# Altium PCB Arrow-ESC.PcbDoc (part 1 of 2)
Units mm, origin at the board's own origin, x right, y up, seen from the top; angles counter-clockwise.
Board outline 52 x 37.5 mm, 6 copper layers (Top Layer (SIG), Int1 (GND), Int2 (PWR), Int3 (SIG), Int4 (GND), Bottom Layer (SIG)), stack 1.546 mm thick; 104 components, 70 nets, 376 pads, 567 vias.
Unrouted connection lines stored in the file: 69.
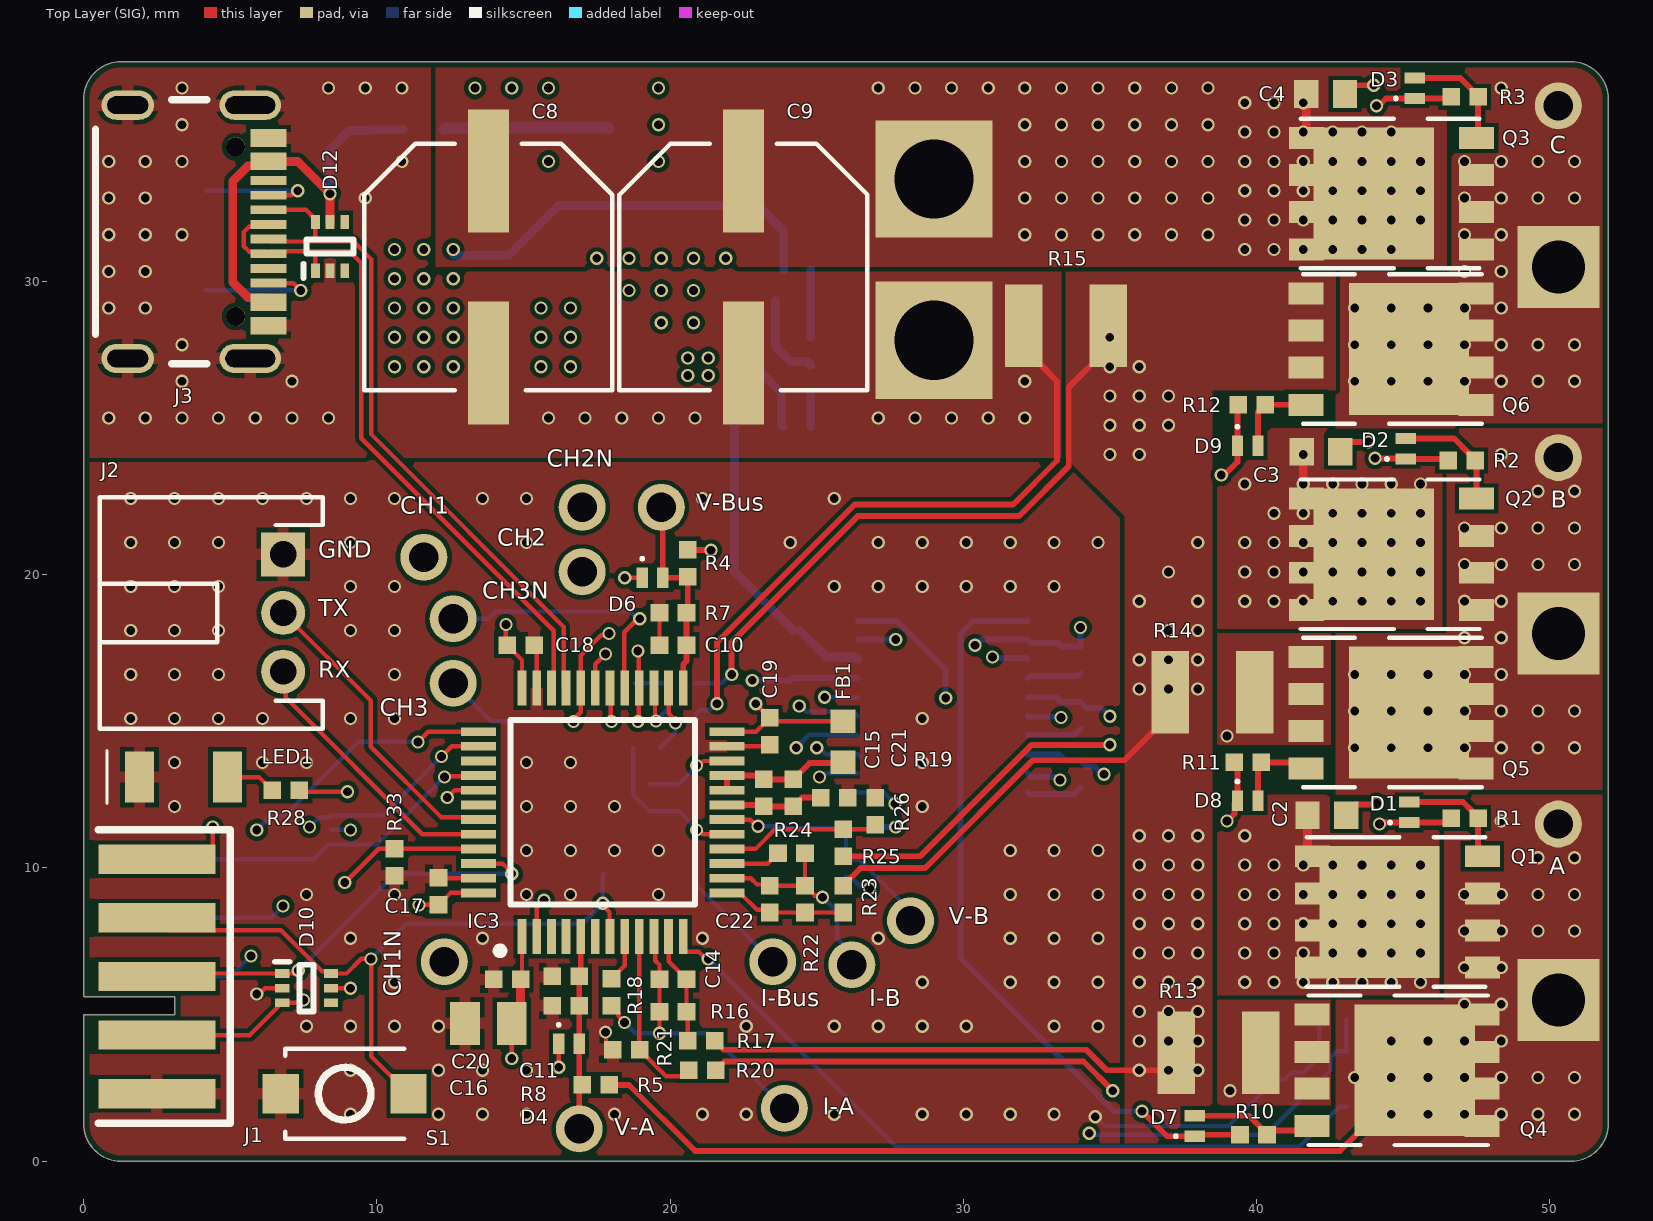
[diagram p0: Top Layer (SIG) view]
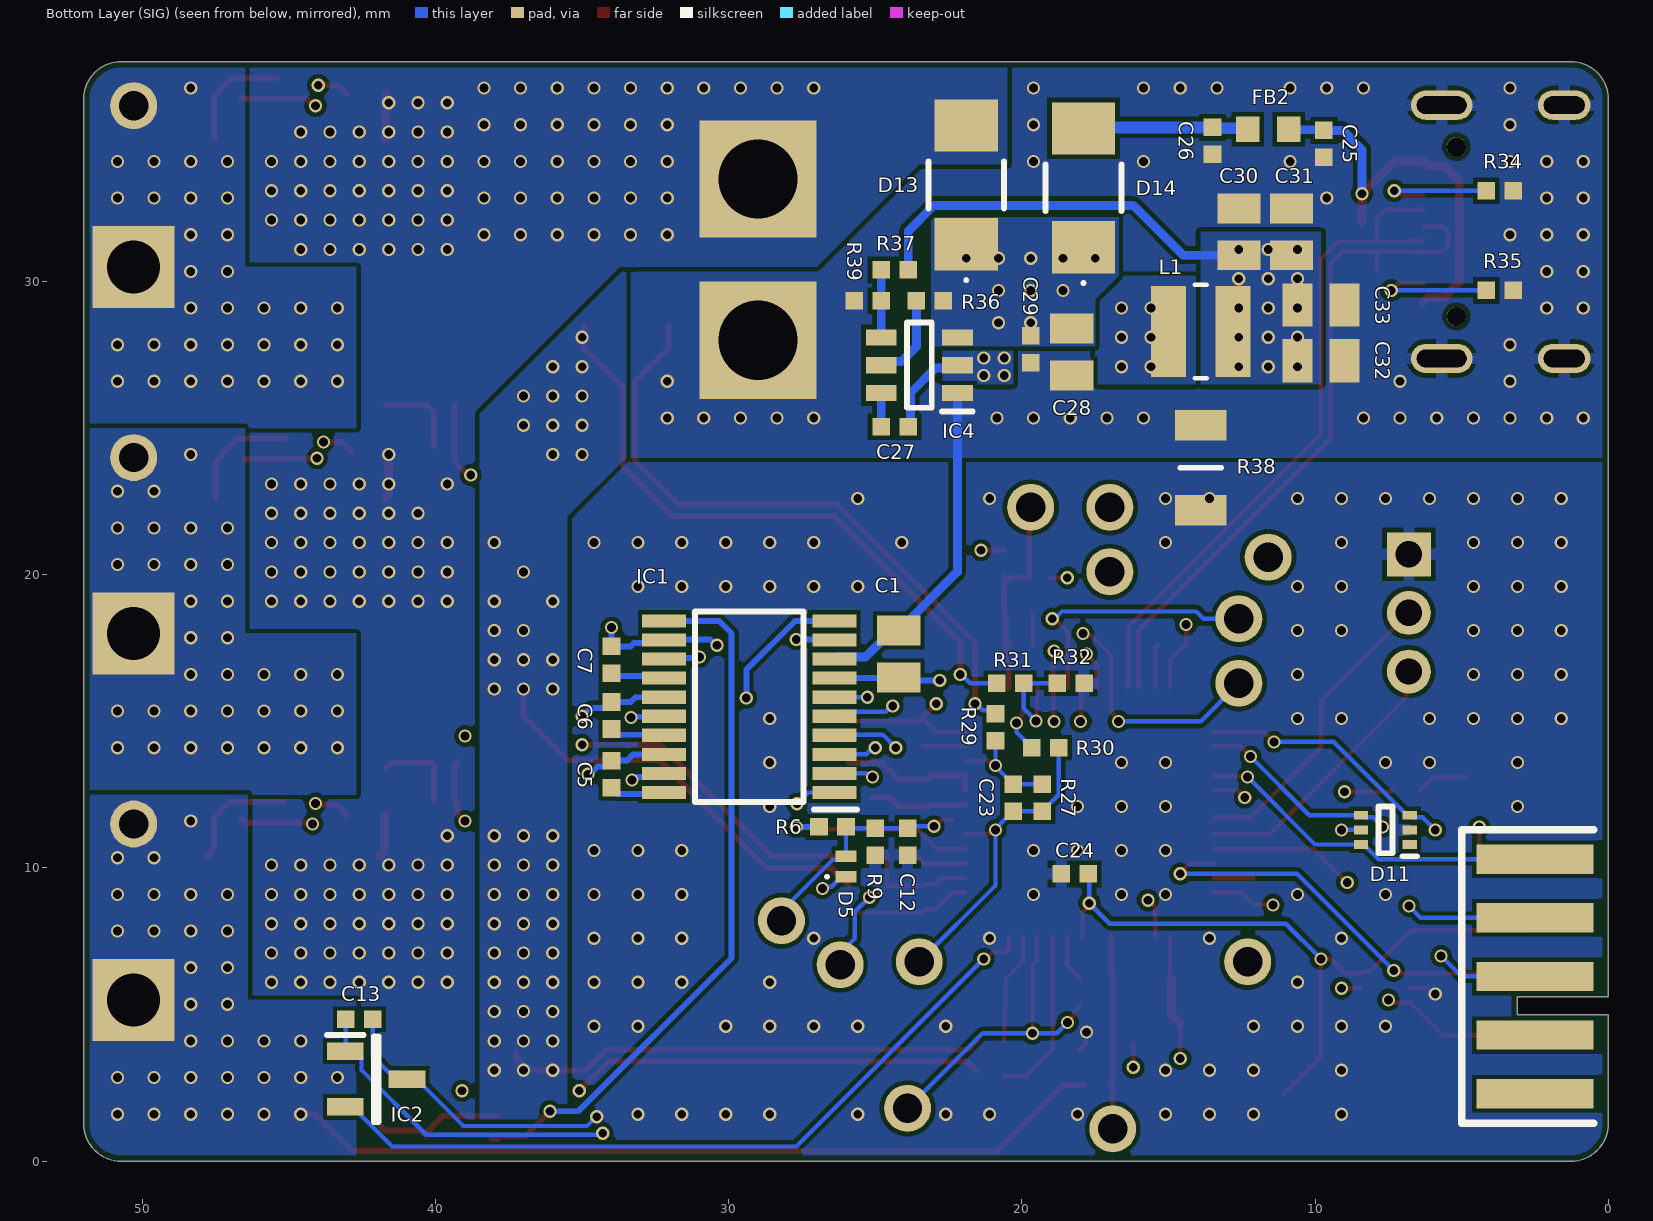
[diagram p1: Bottom Layer (SIG) view, seen from below]
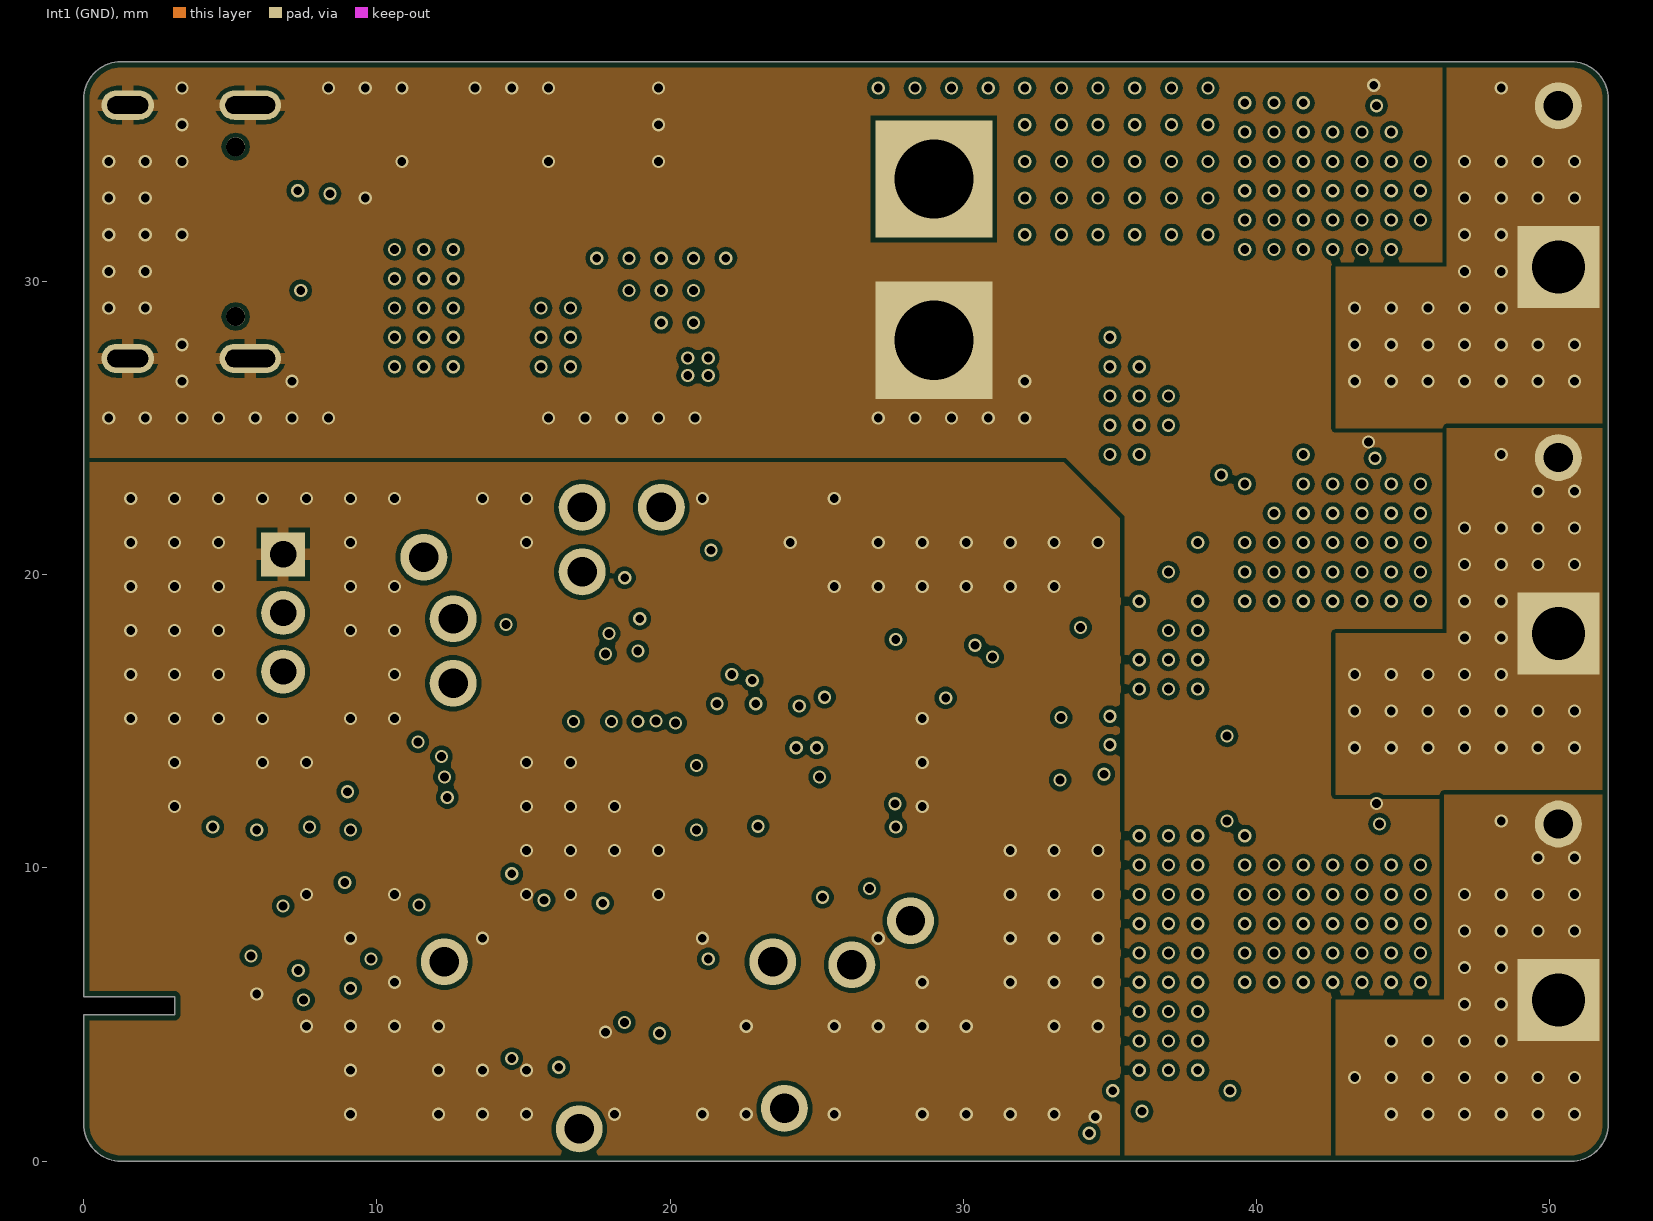
[diagram p2: Int1 (GND)]
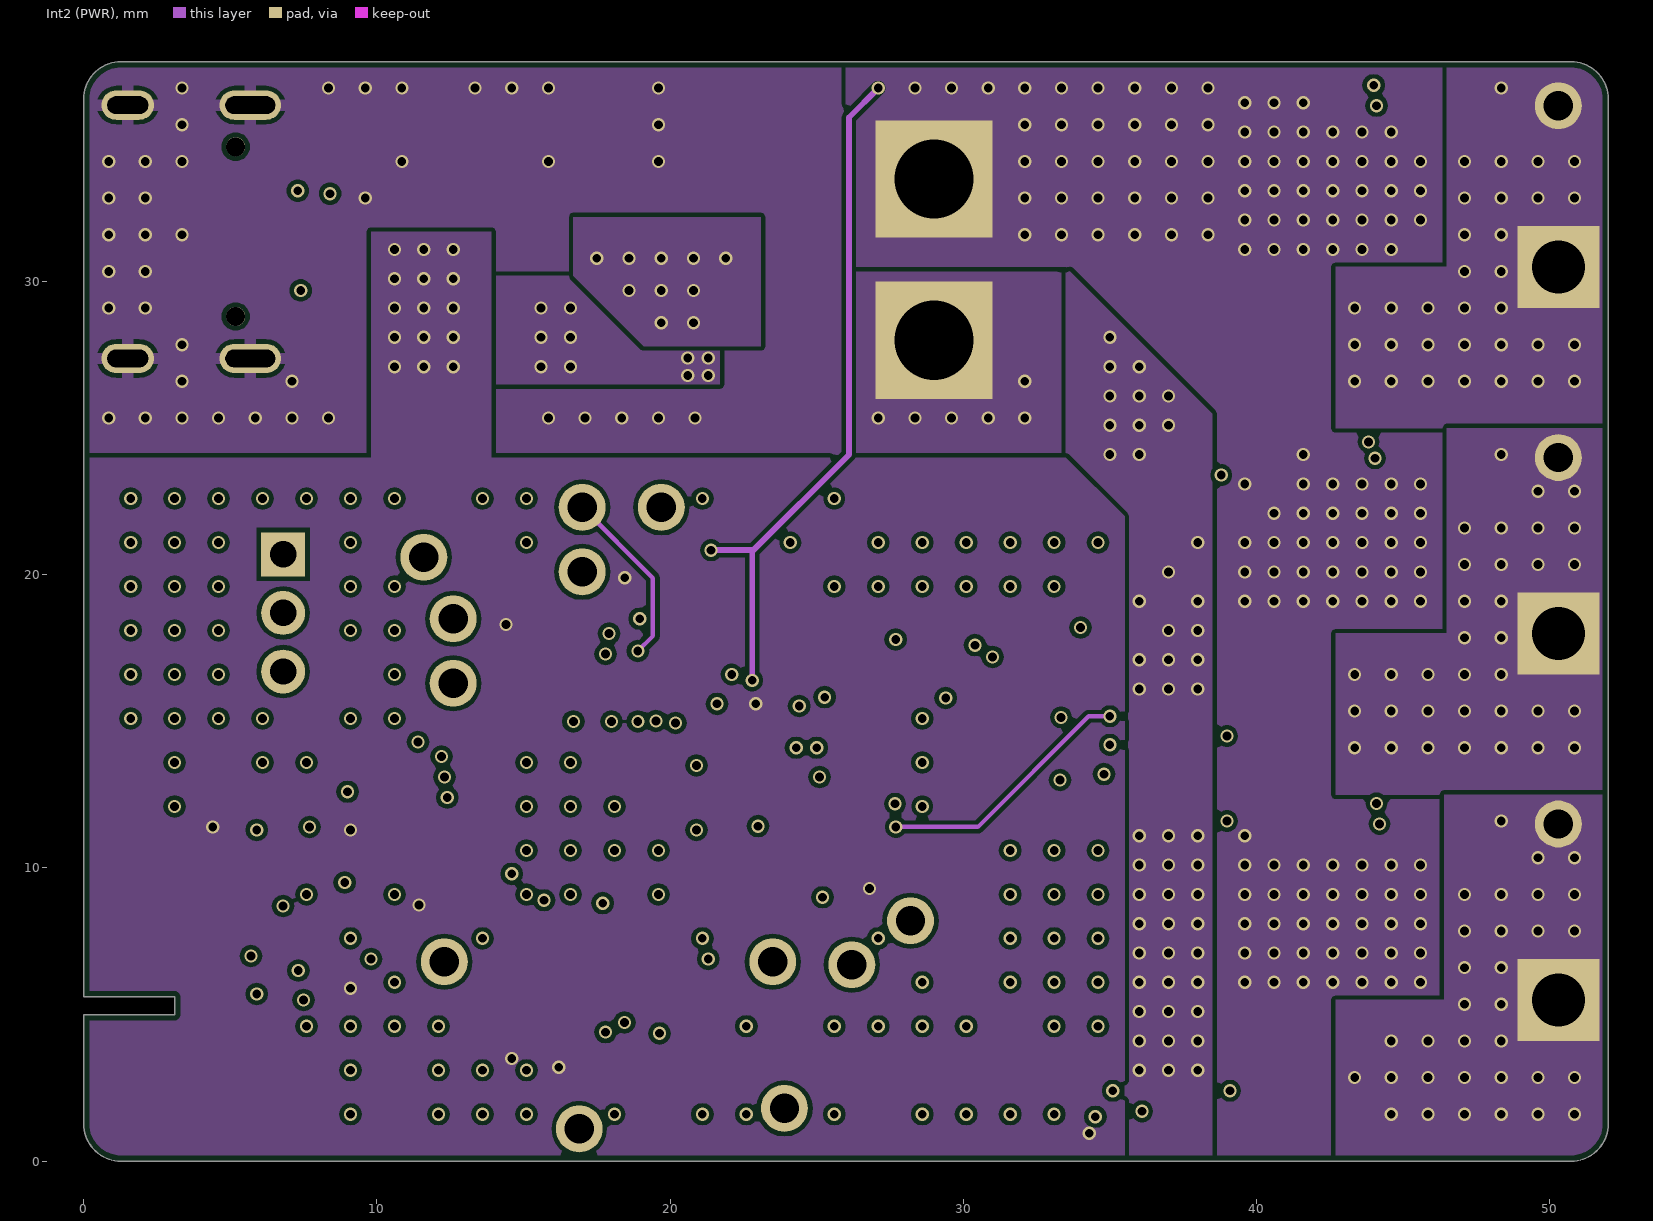
[diagram p3: Int2 (PWR)]
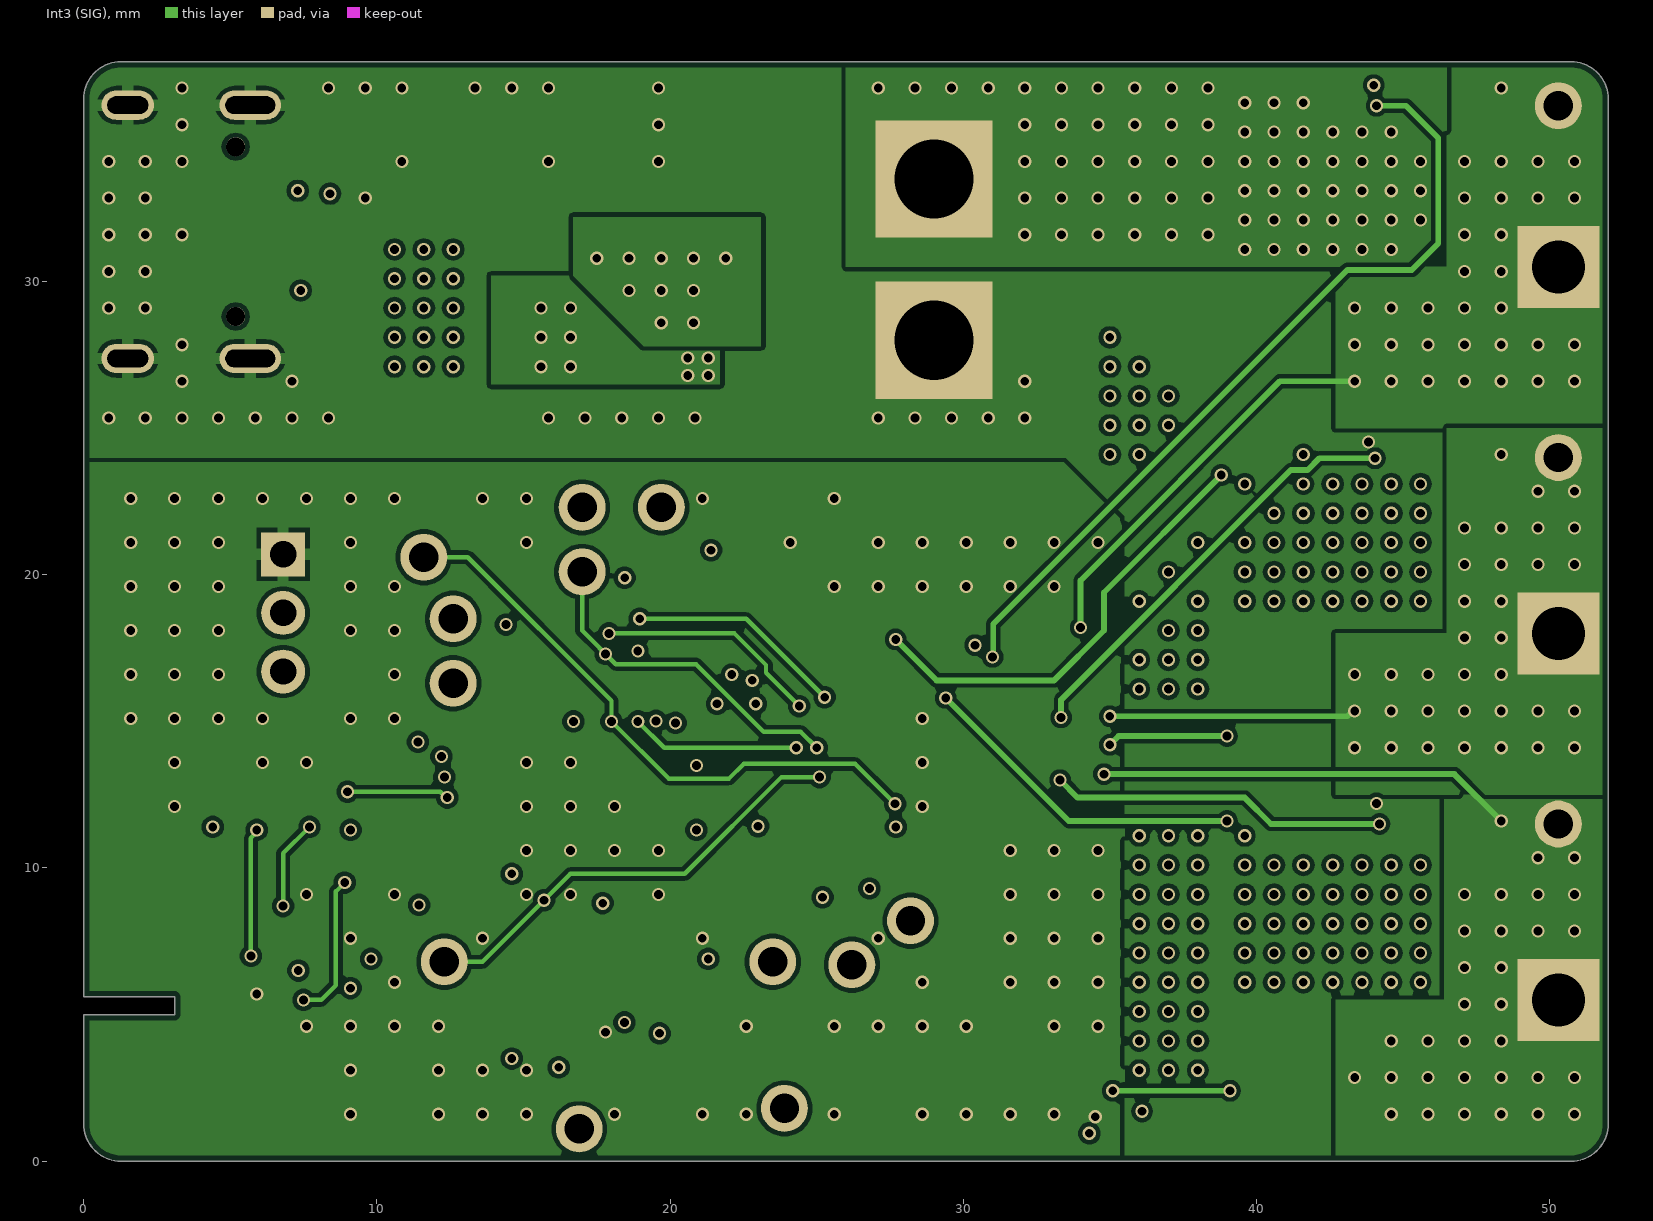
[diagram p4: Int3 (SIG)]
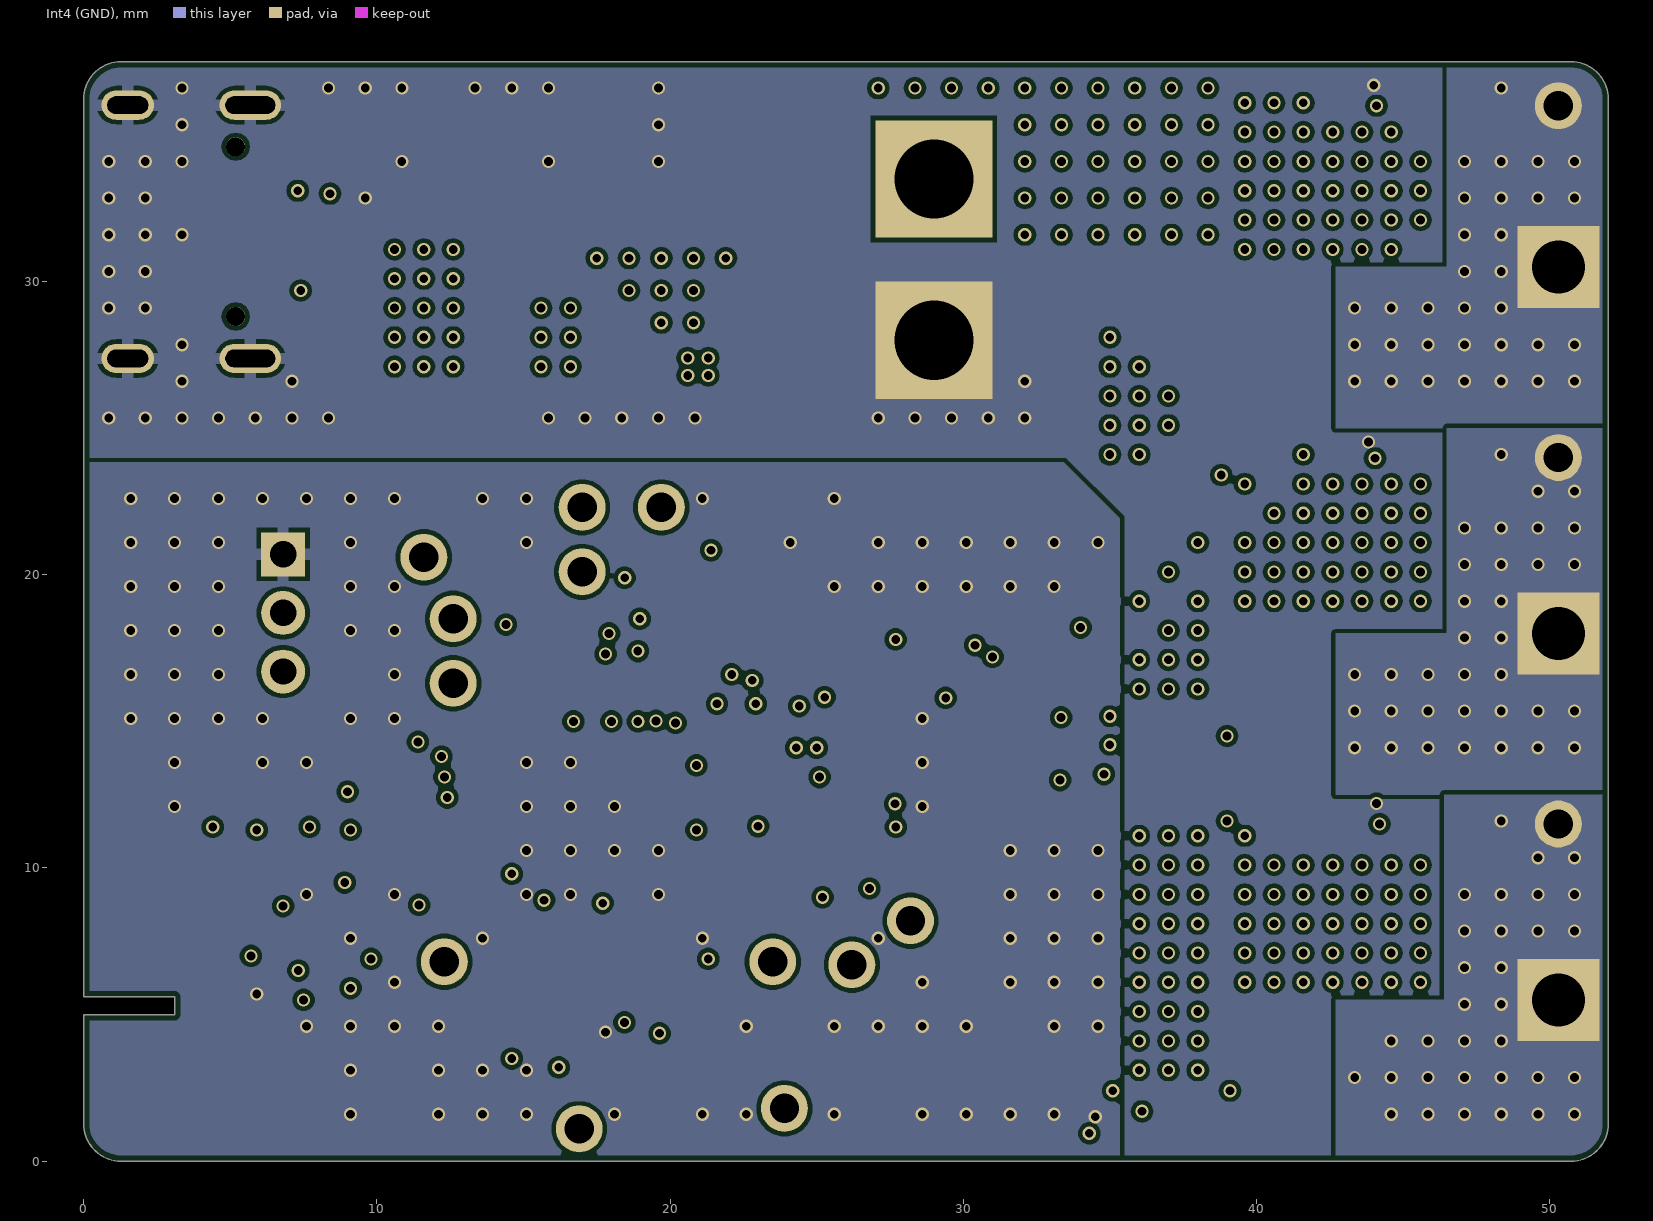
[diagram p5: Int4 (GND)]
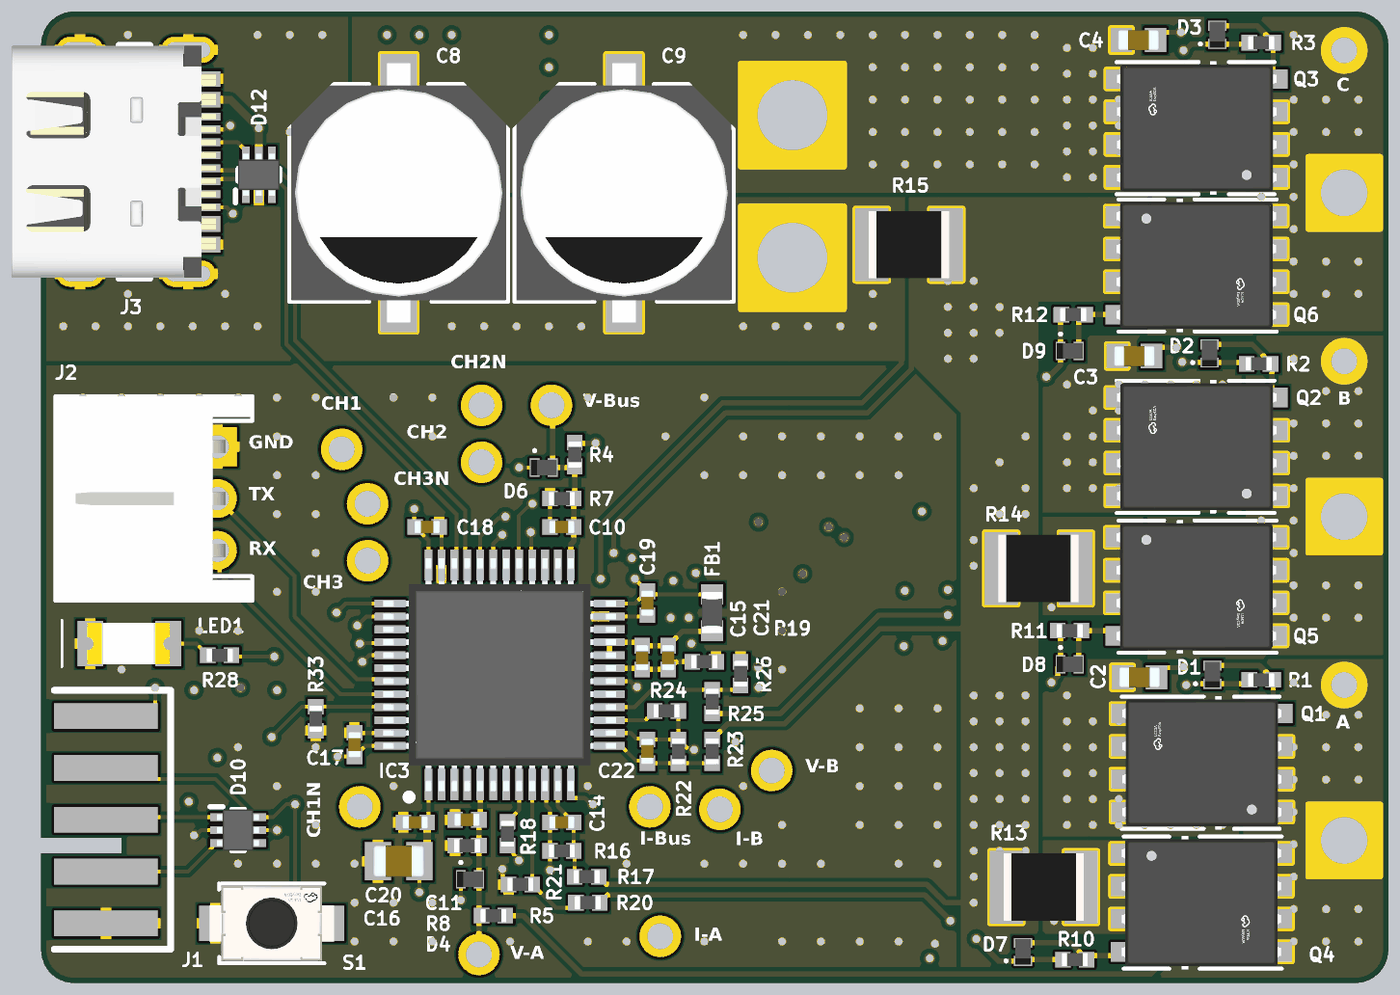
[diagram p7: 3D render of the assembled board from above, using the file's embedded part models]
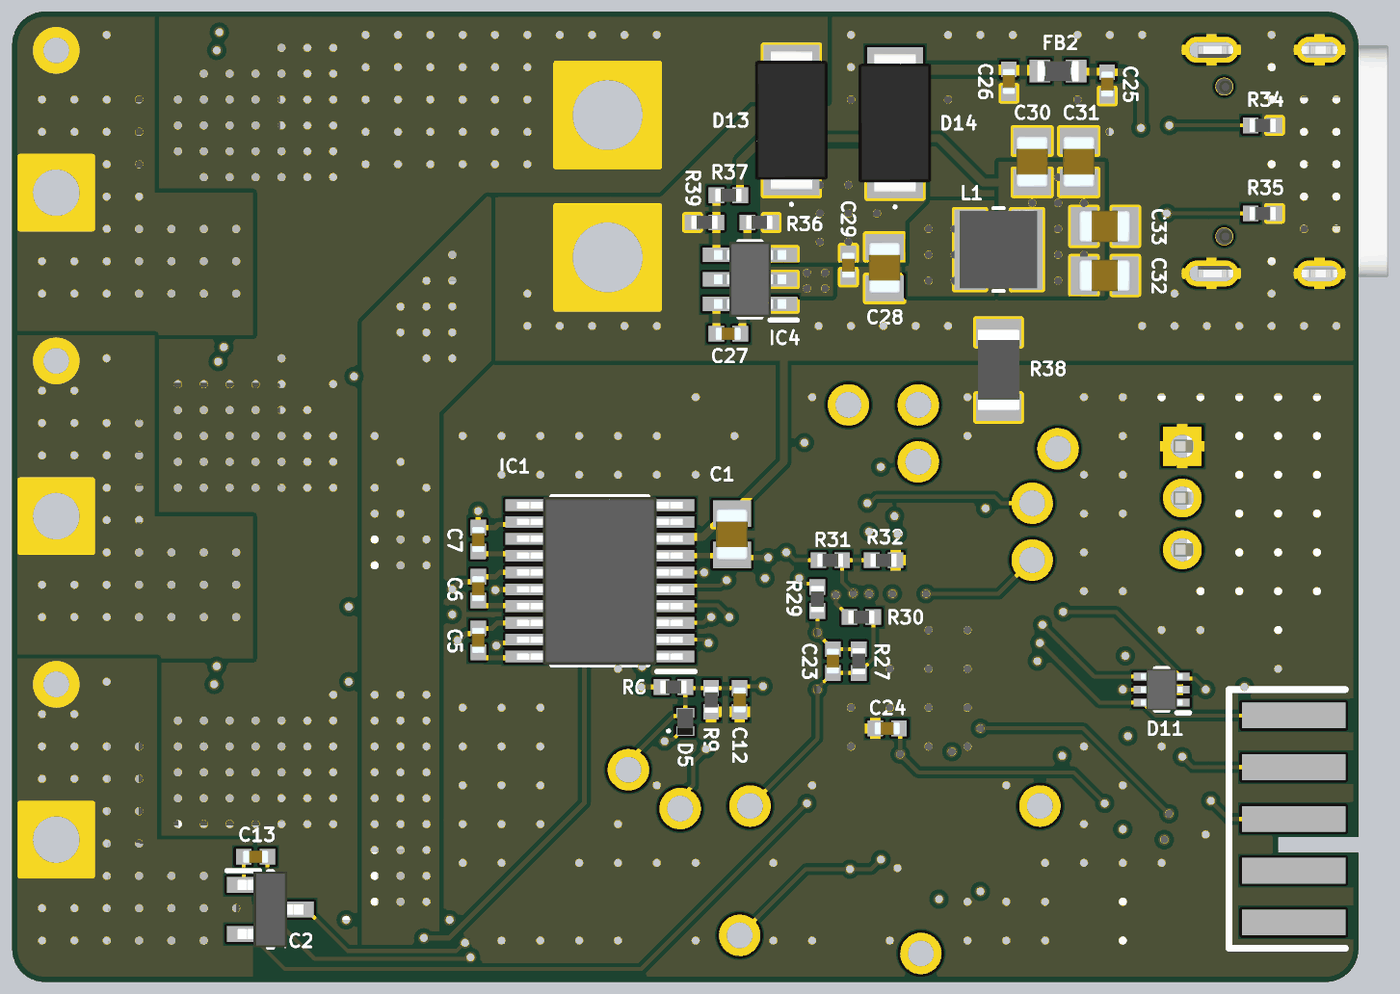
[diagram p8: 3D render of the assembled board from below, using the file's embedded part models]

## Layer stack, top to bottom
Top Solder: solder mask 0.0254, SM-001, Dk 4
Top Layer (SIG): signal copper 0.035
Dielectric 1: prepreg 0.0994, PP-015, Dk 4.1
Int1 (GND): signal copper 0.0152
Dielectric 3: core 0.55, Core-035, Dk 4.6
Int2 (PWR): signal copper 0.0152
Dielectric 4: prepreg 0.1164, PP-016, Dk 4.16
Int3 (SIG): signal copper 0.0152
Dielectric 6: core 0.55, Core-035, Dk 4.6
Int4 (GND): signal copper 0.0152
Dielectric 8: prepreg 0.0994, PP-015, Dk 4.1
Bottom Layer (SIG): signal copper 0.035
Bottom Solder: solder mask 0.0254, SM-001, Dk 4

## Board outline
0,1.27 0,5 3.1,5 3.1,5.6 0,5.6 0,36.23 cw(c1.27,36.23) 1.27,37.5 50.73,37.5 cw(c50.73,36.23) 52,36.23 52,1.27 cw(c50.73,1.27) 50.73,0 1.27,0 cw(c1.27,1.27)

## Design rules (kind name [scope] priority, off if disabled: settings)
BoardOutlineClearance [All] p1: gap=0.2 ignorepadtopadclearanceinfootprint=FALSE
Clearance "Stitching NetC15_1" [IsStitchingVia and InNet('NetC15_1') vs (IsVia and (Not IsStitchingVia)) Or IsPad] p1: gap=0 ignorepadtopadclearanceinfootprint=FALSE
Clearance [All] p2: gap=0.15 ignorepadtopadclearanceinfootprint=TRUE
DiffPairsRouting [All] p1: maxlimit=0.185 minlimit=0.127 mostfreqgap=0.127 toplayer_mingap=0.185 toplayer_prefgap=0.185 toplayer_minwidth=0.15 toplayer_maxwidth=0.15 toplayer_prefwidth=0.15 midlayer1_maxgap=0.127 midlayer1_minwidth=0.118 midlayer1_maxwidth=0.118 midlayer1_prefwidth=0.118 midlayer2_maxgap=0.127 midlayer2_minwidth=0.118 midlayer2_maxwidth=0.118 midlayer2_prefwidth=0.118 midlayer3_maxgap=0.127 midlayer3_minwidth=0.108 midlayer3_maxwidth=0.108 midlayer3_prefwidth=0.108 midlayer4_maxgap=0.127 midlayer4_minwidth=0.108 midlayer4_maxwidth=0.108 midlayer4_prefwidth=0.108 bottomlayer_mingap=0.185 bottomlayer_prefgap=0.185 bottomlayer_minwidth=0.15 bottomlayer_maxwidth=0.15 bottomlayer_prefwidth=0.15 impedanceprofiledriven=TRUE impedanceprofileid={39DB927E-795B-4ED0-B4A4-2D9BE5016878} impedanceprofilevalue=90.000000 maxuncoupledlength=12.7
HoleSize [All] p1: absolutevalues=TRUE maxlimit=5 minlimit=0.025 maxpercent=80.000 minpercent=20.000
HoleToHoleClearance [All] p1: gap=0.2 allowstackedmicrovias=FALSE
MinimumSolderMaskSliver [All] p1: minsoldermaskwidth=0.1
PolygonConnect PolygonConnect_2 [All vs isVia] p1: connectstyle=Direct reliefconductorwidth=0.254 reliefentries=4 polygonreliefangle="90 Angle" airgapwidth=0.254
PolygonConnect PolygonConnect_4 [(InNet('PGND') AND (InComponent('J3') OR InComponent('R25') OR InComponent('R20') OR InComponent('R21') OR InComponent('D3') OR InComponent('C19') OR InComponent('C18')))] p2: connectstyle=Relief reliefconductorwidth=0.4 reliefentries=4 polygonreliefangle="90 Angle" airgapwidth=0.15
PolygonConnect PolygonConnect_1 [InNetClass('High-Current')] p3: connectstyle=Direct reliefconductorwidth=0.254 reliefentries=4 polygonreliefangle="90 Angle" airgapwidth=0.254
PolygonConnect [InComponentClass('U_Buck')] p4: connectstyle=Direct reliefconductorwidth=0.254 reliefentries=4 polygonreliefangle="90 Angle" airgapwidth=0.127
PolygonConnect PolygonConnect_3 [All] p5: connectstyle=Relief reliefconductorwidth=0.4 reliefentries=4 polygonreliefangle="90 Angle" airgapwidth=0.15
RoutingVias [All] p1: holewidth=0.711 width=0.8 viastyle="Through Hole" minholewidth=0.3 minwidth=0.45 maxholewidth=0.711 maxwidth=1.27
SilkToSilkClearance [All] p1: silktosilkclearance=0.1
SilkToSolderMaskClearance [IsPad] p1: minsilkscreentomaskgap=0.1 clearancetoexposedcopper=TRUE
SolderMaskExpansion SolderMaskExpansion_1 [IsVia] p1: expansion=0.102 istentingtop=TRUE
SolderMaskExpansion [All] p2: expansion=0.102 istentingtop=FALSE
SupplyNets "Schematic Supply Nets_7" [InNet('+3V3')] p1: voltage=0.000
SupplyNets "Schematic Supply Nets" [InNet('+3V3A')] p2: voltage=0.000
SupplyNets "Schematic Supply Nets_6" [InNet('PGND')] p3: voltage=0.000
SupplyNets "Schematic Supply Nets_5" [InNet('DGND')] p4: voltage=0.000
SupplyNets "Schematic Supply Nets_3" [InNet('AGND')] p5: voltage=0.000
SupplyNets "Schematic Supply Nets_1" [InNet('VBATT')] p6: voltage=0.000
Width [All] p1: maxlimit=0.5 minlimit=0.15 preferedwidth=0.15 minimp=50.000000 maximp=50.000000 favimp=50.000000
24 further rules are at their usual default settings.

## Classes and differential pairs
component class "Top Level": J2
net class High-Current: NetQ4_1 NetQ5_1 NetQ6_1 PGND SHA SHB SHC VBATT
component class "U_Motor Driver": C1 C2 C3 C4 C5 C6 C7 C8 C9 C10 C11 C12 C13 D1 D2 D3 D4 D5 D6 D7 D8 D9 IC1 IC2 Q1 Q2 Q3 Q4 Q5 Q6 R1 R2 R3 R4 R5 R6 R7 R8 R9 R10 R11 R12 R13 R14 R15
component class U_Buck: C25 C26 C27 C28 C29 C30 C31 C32 C33 D12 D13 D14 FB2 IC4 J3 L1 R34 R35 R36 R37 R38 R39
component class U_STM32G4: C14 C15 C16 C17 C18 C19 C20 C21 C22 C23 C24 D10 D11 FB1 IC3 J1 LED1 R16 R17 R18 R19 R20 R21 R22 R23 R24 R25 R26 R27 R28 R29 R30 R31 R32 R33 S1
differential pair USB_D: +USB_D_P -USB_D_N

## Components (designator, comment, footprint, x,y, rotation, side; value= is the part's Value field where it differs from the comment)
C1 "0805,X5R,10uF,25V,10%" CAPC2012X145N 24.2,17.3 r90 bottom
C2 "0603,X5R,2.2uF,25V,10%" CAPC1608X90N 42.4,11.8 r0 top
C3 "0603,X5R,2.2uF,25V,10%" CAPC1608X90N 42.2,24.2 r0 top
C4 "0603,X5R,2.2uF,25V,10%" CAPC1608X90N 42.36,36.4 r0 top
C5 "0402,X7R,100nF,50V,10%" CAPC1005X55N 34,13.2 r270 bottom
C6 "0402,X7R,100nF,50V,10%" CAPC1005X55N 34,15.2 r270 bottom
C7 "0402,X7R,100nF,50V,10%" CAPC1005X55N 34,17.1 r270 bottom
C8 "560uF,25V,20%" CAP-SMD_BD8.0-L8.3-W8.3-FD 13.8,30.5 r270 top
C9 "560uF,25V,20%" CAP-SMD_BD8.0-L8.3-W8.3-FD 22.5,30.5 r270 top
C10 "0402,X7R,47nF,50V,5%" CAPC1005X55N 20.1,17.6 r0 top
C11 "0402,X7R,47nF,50V,5%" CAPC1005X55N 16.44,6.3 r0 top
C12 "0402,X7R,47nF,50V,5%" CAPC1005X55N 23.9,10.9 r90 bottom
C13 "0402,X7R,100nF,50V,10%" CAPC1005X55N 42.6,4.84 r0 bottom
C14 "0402,NP0,390pF,50V,5%" CAPC1005X55N 20.1,6.2 r180 top
C15 "0402,X7R,100nF,50V,10%" CAPC1005X55N 23.2,12.56 r90 top
C16 "0805,X5R,10uF,25V,10%" CAPC2012X145N 13.8,4.7 r0 top
C17 "0402,X7R,100nF,50V,10%" CAPC1005X55N 12.1,9.2 r270 top
C18 "0402,X7R,100nF,50V,10%" CAPC1005X55N 14.9,17.6 r180 top
C19 "0402,X7R,100nF,50V,10%" CAPC1005X55N 23.4,14.66 r90 top
C20 "0402,X7R,100nF,50V,10%" CAPC1005X55N 14.44,6.2 r0 top
C21 "0402,X5R,1uF,25V,10%" CAPC1005X55N 24.2,12.56 r90 top
C22 "0402,NP0,390pF,50V,5%" CAPC1005X55N 23.4,8.94 r90 top
C23 "0402,NP0,390pF,50V,5%" CAPC1005X55N 20.3,12.4 r270 bottom
C24 "0402,X7R,100nF,50V,10%" CAPC1005X55N 18.2,9.8 r180 bottom
C25 "0402,X7R,47nF,50V,5%" CAPC1005X55N 9.7,34.7 r90 bottom
C26 "0402,X7R,100nF,50V,10%" CAPC1005X55N 13.5,34.8 r90 bottom
C27 "0402,X7R,100nF,50V,10%" CAPC1005X55N 24.34,25.05 r0 bottom
C28 "0805,X5R,10uF,25V,10%" CAPC2012X145N 18.3,27.6 r90 bottom
C29 "0402,X7R,100nF,50V,10%" CAPC1005X55N 19.7,27.7 r90 bottom
C30 "0805,X5R,22uF,25V,20%" CAPC2012X145N 12.6,31.7 r270 bottom
C31 "0805,X5R,22uF,25V,20%" CAPC2012X145N 10.8,31.7 r270 bottom
C32 "0805,X5R,22uF,25V,20%" CAPC2012X145N 9.8,27.3 r0 bottom
C33 "0805,X5R,22uF,25V,20%" CAPC2012X145N 9.8,29.2 r0 bottom
D1 "CDBQC0130L-HF" CDBQC0130LHF 45.21,11.9 r90 top
D2 "CDBQC0130L-HF" CDBQC0130LHF 45.1,24.3 r90 top
D3 "CDBQC0130L-HF" CDBQC0130LHF 45.4,36.6 r90 top
D4 "CDBQC0130L-HF" CDBQC0130LHF 16.55,4 r0 top
D5 "CDBQC0130L-HF" CDBQC0130LHF 26,10.05 r90 bottom
D6 "CDBQC0130L-HF" CDBQC0130LHF 19.4,19.9 r0 top
D7 "CDBQC0130L-HF" CDBQC0130LHF 37.9,1.2 r90 top
D8 "CDBQC0130L-HF" CDBQC0130LHF 39.7,12.3 r0 top
D9 "CDBQC0130L-HF" CDBQC0130LHF 39.7,24.4 r0 top
D10 "DT1446-04V-7" SOTFL50P162X60-6N 7.6,5.9 r0 top
D11 "DT1446-04V-7" SOTFL50P162X60-6N 7.6,11.3 r0 bottom
D12 "DT1446-04V-7" SOTFL50P162X60-6N 8.4,31.2 r90 top
D13 "SK34A-LTP" SK34ALTP 21.9,33.3 r270 bottom
D14 "SK34A-LTP" SK34ALTP 17.9,33.2 r270 bottom
FB1 "600R@100MHz" L0603 25.9,14.3 r90 top
FB2 "600R@100MHz" L0603 11.6,35.2 r0 bottom
IC1 "DRV8300DPWR" SOP65P640X120-20N 29.3,15.5 r0 bottom
IC2 "TMP236A2DBZR" SOT95P237X112-3N 42.025,2.8 r180 bottom
IC3 "STM32G431CBT6" QFP50P900X900X160-48N 17.7,11.9 r90 top
IC4 "TPS54202HDDCR" SOT95P280X100-6N 23.5,27.15 r0 bottom
J1 "STLINK-SW" 009159010061911 2.5,2.3 r90 top
J2 "S3B-PH-K-S-(LF)(SN)" CONN-TH_3P-P2.00_S3B-PH-K-S-LF-SN 6.8,18.7 r270 top
J3 "GT-USB-7010ASV" USB-C-SMD_G-SWITCH_GT-USB-7010ASV 3.9,31.7 r270 top
L1 "2.5A,10uH,135mR,20%" IND-SMD_L3.0-W3.0_FTC303020D 13.9,28.3 r180 bottom
LED1 "1206,GREEN" LEDC3216X120N 3.4,13.1 r0 top
Q1 "SIR182DP-T1-RE3" POWERPAK-SO-8_L5.9-W4.9-P1.27-LS6.2-BL 44.81,8.5 r90 top
Q2 "SIR182DP-T1-RE3" POWERPAK-SO-8_L5.9-W4.9-P1.27-LS6.2-BL 44.61,20.7 r90 top
Q3 "SIR182DP-T1-RE3" POWERPAK-SO-8_L5.9-W4.9-P1.27-LS6.2-BL 44.61,33 r90 top
Q4 "SIR182DP-T1-RE3" POWERPAK-SO-8_L5.9-W4.9-P1.27-LS6.2-BL 44.79,3.1 r270 top
Q5 "SIR182DP-T1-RE3" POWERPAK-SO-8_L5.9-W4.9-P1.27-LS6.2-BL 44.59,15.3 r270 top
Q6 "SIR182DP-T1-RE3" POWERPAK-SO-8_L5.9-W4.9-P1.27-LS6.2-BL 44.59,27.7 r270 top
R1 "0402,10R,1%" RESC1005X40N 47.1,11.7 r0 top
R2 "0402,10R,1%" RESC1005X40N 47,23.9 r0 top
R3 "0402,10R,1%" RESC1005X40N 47.1,36.3 r0 top
R4 "0402,4.7K,1%" RESC1005X40N 20.6,20.4 r90 top
R5 "0402,4.7K,1%" RESC1005X40N 17.46,2.6 r0 top
R6 "0402,4.7K,1%" RESC1005X40N 26.46,11.4 r0 bottom
R7 "0402,1K,1%" RESC1005X40N 20.1,18.7 r0 top
R8 "0402,1K,1%" RESC1005X40N 16.44,5.3 r0 top
R9 "0402,1K,1%" RESC1005X40N 25,10.9 r90 bottom
R10 "0402,10R,1%" RESC1005X40N 39.9,0.9 r0 top
R11 "0402,10R,1%" RESC1005X40N 39.7,13.6 r0 top
R12 "0402,10R,1%" RESC1005X40N 39.84,25.8 r0 top
R13 "1210, 1mR, 1%" R1210 38.7,3.7 r0 top
R14 "1210, 1mR, 1%" R1210 38.5,16 r0 top
R15 "1210, 1mR, 1%" R1210 33.5,28.5 r0 top
R16 "0402,100K,1%" RESC1005X40N 20.1,5.1 r0 top
R17 "0402,1K,1%" RESC1005X40N 21.06,4.1 r180 top
R18 "0402,0R,1%" RESC1005X40N 18,5.76 r90 top
R19 "0402,0R,1%" RESC1005X40N 25.6,12.4 r0 top
R20 "0402,1K,1%" RESC1005X40N 21.1,3.1 r180 top
R21 "0402,100K,1%" RESC1005X40N 18.5,3.8 r0 top
R22 "0402,100K,1%" RESC1005X40N 24.6,8.94 r270 top
R23 "0402,1K,1%" RESC1005X40N 25.9,8.94 r270 top
R24 "0402,0R,1%" RESC1005X40N 24.14,10.5 r180 top
R25 "0402,1K,1%" RESC1005X40N 25.9,10.86 r90 top
R26 "0402,100K,1%" RESC1005X40N 27,11.94 r270 top
R27 "0402,100K,1%" RESC1005X40N 19.3,12.4 r270 bottom
R28 "0402,330R,1%" RESC1005X40N 6.89,12.65 r180 top
R29 "0402,1K,1%" RESC1005X40N 20.9,14.8 r270 bottom
R30 "0402,0R,1%" RESC1005X40N 19.2,14.1 r0 bottom
R31 "0402,1K,1%" RESC1005X40N 20.4,16.3 r180 bottom
R32 "0402,100K,1%" RESC1005X40N 18.34,16.3 r0 bottom
R33 "0402,10K,1%" RESC1005X40N 10.6,10.2 r90 top
R34 "0402,5.1K,1%" RESC1005X40N 3.7,33.1 r0 bottom
R35 "0402,5.1K,1%" RESC1005X40N 3.7,29.7 r0 bottom
R36 "0402,510K,1%" RESC1005X40N 23.14,29.35 r180 bottom
R37 "0402,100K,1%" RESC1005X40N 24.34,30.4 r180 bottom
R38 "1206,0R,1%" RESC3116X65N 13.9,23.65 r270 bottom
R39 "0402,22.1K,1%" RESC1005X40N 25.26,29.35 r180 bottom
S1 "TS-1088-AR02016" SW-SMD_L3.9-W3.0-P4.45 8.9,2.3 r0 top

## Footprints (in the part's own frame and the unit in brackets; to place one, negate y for a bottom-side part, rotate by r counter-clockwise, add the part's x,y. Pads: shape width x height; smd on the part's side, far side on the other; paste and mask are expansions set on the pad)
009159010061911 [mm]
  rect 1x4 smd: 1(0,0) 2(2,0) 3(4,0) 4(6,0) 5(8,0)
  rect 1x4 smd far side: 6(0,0) 7(2,0) 8(4,0) 9(6,0) 10(8,0)
  silkscreen extent -1,-2.5 9,2
CAP-SMD_BD8.0-L8.3-W8.3-FD [mm]
  rect 4.2x1.4 smd: 1(-3.27,0) 2(3.27,0)
  silkscreen extent -4.2,-4.23 4.2,4.23, body extent -5,-4.15 5,4.15, height 10
CAPC1005X55N [mm]
  rect 0.6x0.6 smd: 1(-0.46,0) 2(0.46,0)
  body extent -0.5,-0.25 0.5,0.25, height 0.55
CAPC1608X90N [mm]
  rect 0.83x0.94 smd: 1(-0.66,0) 2(0.66,0)
  body extent -0.8,-0.4 0.8,0.4, height 0.9
CAPC2012X145N [mm]
  rect 1.02x1.47 smd: 1(-0.8,0) 2(0.8,0)
  body extent -1,-0.63 1,0.63, height 1.45
CDBQC0130LHF [mm]
  rect 0.38x0.7 smd: 1(-0.35,0) 2(0.35,0)
  silkscreen extent -0.4,0.6 -0.3,0.7, body extent -0.5,-0.3 0.5,0.3, height 0.55
CONN-TH_3P-P2.00_S3B-PH-K-S-LF-SN [mm]
  rect 1.5x1.5 hole 0.9: 1(-2,0)
  round 1.5 hole 0.9: 2(0,0) 3(2,0)
  silkscreen extent -3.95,-6.25 3.95,1.35, body extent -3.95,-6.17 3.95,1.43, height 4.8
IND-SMD_L3.0-W3.0_FTC303020D [mm]
  rect 1.2x3.1 smd: 1(-1.1,0) 2(1.1,0)
  silkscreen extent -0.2,-1.6 0.2,1.6, body extent -1.5,-1.5 1.5,1.51, height 2
L0603 [mm]
  rect 0.8x0.86 smd: 1(-0.7,0) 2(0.7,0)
  body extent -0.8,-0.4 0.8,0.4, height 0.5
LEDC3216X120N [mm]
  rect 1x1.75 smd: 1(-1.5,0) 2(1.5,0)
  silkscreen extent -2.6,-0.9 -2.6,0.9, body extent -1.63,-0.8 1.57,0.8, height 1.1
POWERPAK-SO-8_L5.9-W4.9-P1.27-LS6.2-BL [mm]
  rect 0.75x1.2 smd: 1(-1.9,-2.9) 2(-0.63,-2.9) 3(0.63,-2.9) 4(1.9,-2.9) 5(1.9,2.9) 6(0.63,2.9) 7(-0.63,2.9) 8(-1.9,2.9)
  rect 4.5x4.1 smd: 8(0,0.61)
  silkscreen extent -2.55,-3 2.55,3.1, body extent -2.58,-3.08 2.58,3.08, height 1.06
QFP50P900X900X160-48N [mm]
  rect 1.2x0.3 smd: 1(-4.238,2.75) 2(-4.238,2.25) 3(-4.238,1.75) 4(-4.238,1.25) 5(-4.238,0.75) 6(-4.238,0.25) 7(-4.238,-0.25) 8(-4.238,-0.75) 9(-4.238,-1.25) 10(-4.238,-1.75) 11(-4.238,-2.25) 12(-4.238,-2.75) 25(4.238,-2.75) 26(4.238,-2.25) 27(4.238,-1.75) 28(4.238,-1.25) 29(4.238,-0.75) 30(4.238,-0.25) 31(4.238,0.25) 32(4.238,0.75) 33(4.238,1.25) 34(4.238,1.75) 35(4.238,2.25) 36(4.238,2.75)
  rect 0.3x1.2 smd: 13(-2.75,-4.238) 14(-2.25,-4.238) 15(-1.75,-4.238) 16(-1.25,-4.238) 17(-0.75,-4.238) 18(-0.25,-4.238) 19(0.25,-4.238) 20(0.75,-4.238) 21(1.25,-4.238) 22(1.75,-4.238) 23(2.25,-4.238) 24(2.75,-4.238) 37(2.75,4.238) 38(2.25,4.238) 39(1.75,4.238) 40(1.25,4.238) 41(0.75,4.238) 42(0.25,4.238) 43(-0.25,4.238) 44(-0.75,4.238) 45(-1.25,4.238) 46(-1.75,4.238) 47(-2.25,4.238) 48(-2.75,4.238)
  silkscreen extent -4.85,-3.15 3.15,3.62, body extent -4.5,-4.5 4.5,4.5, height 1.6
R1210 [mm]
  rect 1.28x2.81 smd: 1(-1.44,0) 2(1.44,0)
  body extent -1.55,-1.3 1.55,1.3, height 0.55
RESC1005X40N [mm]
  rect 0.6x0.6 smd: 1(-0.46,0) 2(0.46,0)
  body extent -0.5,-0.25 0.5,0.25, height 0.4
RESC3116X65N [mm]
  rect 1.05x1.75 smd: 1(-1.45,0) 2(1.45,0)
  silkscreen extent 0,-0.7 0,0.7, body extent -1.55,-0.8 1.55,0.8, height 0.65
SK34ALTP [mm]
  rect 1.78x2.16 smd: 1(2.025,0) 2(-2.025,0)
  silkscreen extent -0.8,-1.29 3.3,1.29, body extent -2.7,-1.4 2.7,1.4, height 2.26
SOP65P640X120-20N [mm]
  rect 1.5x0.45 smd: 1(-2.9,2.925) 2(-2.9,2.275) 3(-2.9,1.625) 4(-2.9,0.975) 5(-2.9,0.325) 6(-2.9,-0.325) 7(-2.9,-0.975) 8(-2.9,-1.625) 9(-2.9,-2.275) 10(-2.9,-2.925) 11(2.9,-2.925) 12(2.9,-2.275) 13(2.9,-1.625) 14(2.9,-0.975) 15(2.9,-0.325) 16(2.9,0.325) 17(2.9,0.975) 18(2.9,1.625) 19(2.9,2.275) 20(2.9,2.925)
  silkscreen extent -3.67,-3.25 1.85,3.5, body extent -3.2,-3.25 3.2,3.25, height 1.13
SOT95P237X112-3N [mm]
  rect 1.25x0.6 smd: 1(-1.05,0.95) 2(-1.05,-0.95) 3(1.05,0)
  silkscreen extent -1.68,-1.46 0.08,1.5, body extent -1.27,-1.46 1.27,1.46, height 1
SOT95P280X100-6N [mm]
  rect 1.05x0.55 smd: 1(-1.3,0.95) 2(-1.3,0) 3(-1.3,-0.95) 4(1.3,-0.95) 5(1.3,0) 6(1.3,0.95)
  silkscreen extent -1.83,-1.45 0.43,1.58, body extent -1.4,-1.45 1.4,1.45, height 1
SOTFL50P162X60-6N [mm]
  rect 0.492x0.3 smd: 1(-0.834,0.5) 2(-0.834,0) 3(-0.834,-0.5) 4(0.834,-0.5) 5(0.834,0) 6(0.834,0.5)
  silkscreen extent -1.08,-0.8 0.24,0.9, body extent -0.81,-0.8 0.81,0.8, height 0.6
SW-SMD_L3.9-W3.0-P4.45 [mm]
  rect 1.23x1.36 smd: 1(-2.18,0) 2(2.18,0)
  silkscreen extent -2.03,-1.54 2.03,1.54, body extent -2.4,-1.45 2.4,1.45, height 1.95
USB-C-SMD_G-SWITCH_GT-USB-7010ASV [mm]
  rrect100% 1x2.1 hole 1.7 slot 0.6 at 0 deg: 1(-4.32,1.78) 2(4.32,1.78)
  rrect100% 1x1.8 hole 1.4 slot 0.6 at 0 deg: 3(4.32,-2.4) 4(-4.32,-2.4)
  rect 0.6x1.24 smd: A1B12(-3.2,2.4) A4B9(-2.4,2.4) B1A12(3.2,2.4) B4A9(2.4,2.4)
  rect 0.3x1.24 smd: A5(-1.25,2.4) A6(-0.25,2.4) A7(0.25,2.4) A8(1.25,2.4) B5(1.75,2.4) B6(0.75,2.4) B7(-0.75,2.4) B8(-1.75,2.4)
  round 0.65 hole 0.65: Un1(2.89,1.28) Un2(-2.9,1.28)
  silkscreen extent -4.5,-3.5 4.5,0.3, body extent -4.47,-5.05 4.47,2.85, height 3.16

## Part data
C1 C16 C28: library part CC0805KKX5R8BB106, "10 µF ±10% 25V Ceramic Capacitor X5R 0805 (2012 Metric)", LCSC Part #=C89831, MANUFACTURER_NAME=YAGEO, Mouser Part Number=603-CC805KKX5R8BB106, Arrow Part Number=CC0805KKX5R8BB106, Arrow Price/Stock=https://www.arrow.com/en/products/cc0805kkx5r8bb106/yageo?utm_currency=USD&region=nac, Datasheet Link=https://www.yageo.com/upload/media/product/productsearch/datasheet/mlcc/UPY-GPHC_X5R_4V-to-50V_27.pdf, Height=1.45mm, MANUFACTURER_PART_NUMBER=CC0805KKX5R8BB106, Mouser Price/Stock=https://www.mouser.co.uk/ProductDetail/YAGEO/CC0805KKX5R8BB106?qs=57cj7OiSijm89pM64t1AGQ%3D%3D
C2 C3 C4: library part CC0603KRX5R8BB225, "2.2 µF ±10% 25V Ceramic Capacitor X5R 0603 (1608 Metric)", Arrow Part Number=CC0603KRX7R9BB105, LCSC Part #=C309478, MANUFACTURER_NAME=YAGEO, MANUFACTURER_PART_NUMBER=CC0603JRNPO9BN560, Mouser Part Number=603-CC603KRX7R9BB105, Arrow Price/Stock=https://www.arrow.com/en/products/cc0603krx7r9bb105/yageo?utm_currency=USD&region=nac, Datasheet Link=https://www.yageo.com/upload/media/product/app/datasheet/mlcc/upy-gphc_x7r_6_3v-to-250v.pdf, Height=0.95mm, Manu Part #=CC0603KRX5R8BB225, Mouser Price/Stock=https://www.mouser.co.uk/ProductDetail/YAGEO/CC0603KRX7R9BB105?qs=6wERJjOp3mmF17%252BYi8cgJQ%3D%3D
C5 C6 C7 C13 C15 C17 C18 C19 C20 C24 C26 C27 C29: library part CC0402KRX7R9BB104, "0.1 µF ±10% 50V Ceramic Capacitor X7R 0402 (1005 Metric)", LCSC Part #=C131394, MANUFACTURER_NAME=YAGEO, Mouser Part Number=603-CC402KRX7R9BB104, Arrow Part Number=CC0402KRX7R9BB104, Arrow Price/Stock=https://www.arrow.com/en/products/cc0402krx7r9bb104/yageo?utm_currency=USD&region=europe, Datasheet Link=https://4donline.ihs.com/images/VipMasterIC/IC/YAGO/YAGO-S-A0003557223/YAGO-S-A0003557223-1.pdf?hkey=6D3A4C79FDBF58556ACFDE234799DDF0, Height=0.55mm, Manu Part #=CC0402KRX7R9BB104, MANUFACTURER_PART_NUMBER=CC0402KRX7R9BB104, Mouser Price/Stock=https://www.mouser.co.uk/ProductDetail/YAGEO/CC0402KRX7R9BB104?qs=vRUrOTOuwyGrQb4GbTIVjw%3D%3D
C8 C9: library part HV1E567M0810PZ, "25V 560uF ±20% SMD,D8xL10.5mm Aluminum - Polymer Capacitors RoHS", LCSC Part #=C5246548, Manu Part #=HV1E567M0810PZ
C10 C11 C12 C25: library part CC0402JRX7R9BB473, "0.047 µF ±5% 50V Ceramic Capacitor X7R 0402 (1005 Metric)", Arrow Part Number=CC0402KRX7R9BB104, LCSC Part #=C576715, MANUFACTURER_NAME=YAGEO, Mouser Part Number=603-CC402KRX7R9BB104, Arrow Price/Stock=https://www.arrow.com/en/products/cc0402krx7r9bb104/yageo?utm_currency=USD&region=europe, Datasheet Link=https://4donline.ihs.com/images/VipMasterIC/IC/YAGO/YAGO-S-A0003557223/YAGO-S-A0003557223-1.pdf?hkey=6D3A4C79FDBF58556ACFDE234799DDF0, Height=0.55mm, Manu Part #=CC0402JRX7R9BB473, MANUFACTURER_PART_NUMBER=CC0402JRX7R9BB473, Mouser Price/Stock=https://www.mouser.co.uk/ProductDetail/YAGEO/CC0402KRX7R9BB104?qs=vRUrOTOuwyGrQb4GbTIVjw%3D%3D
C14 C22 C23: library part CC0402JRNPO9BN391, "390 pF ±5% 50V Ceramic Capacitor C0G, NP0 0402 (1005 Metric)", Arrow Part Number=CC0402KRX7R9BB104, LCSC Part #=C282239, MANUFACTURER_NAME=YAGEO, Mouser Part Number=603-CC402KRX7R9BB104, Arrow Price/Stock=https://www.arrow.com/en/products/cc0402krx7r9bb104/yageo?utm_currency=USD&region=europe, Datasheet Link=https://4donline.ihs.com/images/VipMasterIC/IC/YAGO/YAGO-S-A0003557223/YAGO-S-A0003557223-1.pdf?hkey=6D3A4C79FDBF58556ACFDE234799DDF0, Height=0.55mm, Manu Part #=CC0402JRNPO9BN391, MANUFACTURER_PART_NUMBER=CC0402KRX7R9BB104, Mouser Price/Stock=https://www.mouser.co.uk/ProductDetail/YAGEO/CC0402KRX7R9BB104?qs=vRUrOTOuwyGrQb4GbTIVjw%3D%3D
C21: library part CC0402KRX5R8BB105, "1 µF ±10% 25V Ceramic Capacitor X5R 0402 (1005 Metric)", Arrow Part Number=CC0402KRX7R9BB104, LCSC Part #=C326568, MANUFACTURER_NAME=YAGEO, Mouser Part Number=603-CC402KRX7R9BB104, Arrow Price/Stock=https://www.arrow.com/en/products/cc0402krx7r9bb104/yageo?utm_currency=USD&region=europe, Datasheet Link=https://4donline.ihs.com/images/VipMasterIC/IC/YAGO/YAGO-S-A0003557223/YAGO-S-A0003557223-1.pdf?hkey=6D3A4C79FDBF58556ACFDE234799DDF0, Height=0.55mm, Manu Part #=CC0402KRX5R8BB105, MANUFACTURER_PART_NUMBER=CC0402KRX7R9BB104, Mouser Price/Stock=https://www.mouser.co.uk/ProductDetail/YAGEO/CC0402KRX7R9BB104?qs=vRUrOTOuwyGrQb4GbTIVjw%3D%3D
C30 C31 C32 C33: library part CC0805MKX5R8BB226, "25V 22uF X5R ±20% 0805 Ceramic Capacitors RoHS", Arrow Part Number=CC0805KKX5R8BB106, LCSC Part #=C784585, MANUFACTURER_NAME=YAGEO, Mouser Part Number=603-CC805KKX5R8BB106, Arrow Price/Stock=https://www.arrow.com/en/products/cc0805kkx5r8bb106/yageo?utm_currency=USD&region=nac, Datasheet Link=https://www.yageo.com/upload/media/product/productsearch/datasheet/mlcc/UPY-GPHC_X5R_4V-to-50V_27.pdf, Height=1.45mm, MANUFACTURER_PART_NUMBER=CC0805MKX5R8BB226, Mouser Price/Stock=https://www.mouser.co.uk/ProductDetail/YAGEO/CC0805KKX5R8BB106?qs=57cj7OiSijm89pM64t1AGQ%3D%3D
D1 D2 D3 D4 D5 D6 D7 D8 D9: "Diode 30 V 100mA Surface Mount 0402C/SOD-923F", LCSC Part #=C2886012, MANUFACTURER_NAME="Comchip Technology", Mouser Part Number=750-CDBQC0130L-HF, Arrow Part Number=CDBQC0130L-HF, Arrow Price/Stock=https://www.arrow.com/en/products/cdbqc0130l-hf/comchip-technology?utm_currency=USD&region=nac, Datasheet Link=https://www.comchiptech.com/admin/files/product/CDBQC0130L-HF%20RevB681116.pdf, Height=0.55mm, Manu Part #=CDBQC0130L-HF, MANUFACTURER_PART_NUMBER=CDBQC0130L-HF, Mouser Price/Stock=https://www.mouser.co.uk/ProductDetail/Comchip-Technology/CDBQC0130L-HF?qs=YlpJWyuQ3PMlIcuiqEd%2FoA%3D%3D
D10 D11 D12: "8.5V Clamp 4.7A (8/20µs) Ipp Tvs Diode Surface Mount SOT-563", LCSC Part #=C460066, MANUFACTURER_NAME="Diodes Incorporated", Mouser Part Number=621-DT1446-04V-7, Arrow Part Number=DT1446-04V-7, Arrow Price/Stock=https://www.arrow.com/en/products/dt1446-04v-7/diodes-incorporated, Datasheet Link=https://www.diodes.com//assets/Datasheets/DT1446-04V.pdf, Height=0.6mm, Manu Part #=DT1446-04V-7, MANUFACTURER_PART_NUMBER=DT1446-04V-7, Mouser Price/Stock=https://www.mouser.co.uk/ProductDetail/Diodes-Incorporated/DT1446-04V-7?qs=5V6w%252Be2aIqaQkUd2yRdmdA%3D%3D
D13 D14: "80A 40V 500mV@3A 3A SMA(DO-214AC) Single Diodes RoHS", LCSC Part #=C85269, MANUFACTURER_NAME=MCC, Mouser Part Number=833-SK34A-LTP, Arrow Part Number=SK34A-LTP, Arrow Price/Stock=https://www.arrow.com/en/products/sk34a-ltp/micro-commercial-components?utm_currency=USD&region=nac, Datasheet Link=https://mccsemi.com/pdf/Products/SK32A-L-SK310A-L(DO-214AC).pdf, Height=2.44mm, Manu Part #=SK34A-LTP, MANUFACTURER_PART_NUMBER=SK34A-LTP, Mouser Price/Stock=https://www.mouser.co.uk/ProductDetail/Micro-Commercial-Components-MCC/SK34A-LTP?qs=JeAkOuORR2VPwzg48d%252BVAA%3D%3D
FB1 FB2: library part BLM18AG601SN1D, "380mΩ ±25% 600Ω@100MHz 0603 Ferrite Beads ROHS", LCSC Part #=C19330
IC1: "TSSOP-20 Brushless DC (BLDC) Motor Driver ROHS", LCSC Part #=C3036056, MANUFACTURER_NAME="Texas Instruments", Mouser Part Number=595-DRV8300DPWR, Arrow Part Number=DRV8300DPWR, Arrow Price/Stock=https://www.arrow.com/en/products/drv8300dpwr/texas-instruments?utm_currency=USD&region=nac, Height=1.2mm, MANUFACTURER_PART_NUMBER=DRV8300DPWR, Mouser Price/Stock=https://www.mouser.co.uk/ProductDetail/Texas-Instruments/DRV8300DPWR?qs=eP2BKZSCXI6qJbKdYnGwBg%3D%3D
IC2: "Low-power and high-precision analog output temperature sensor", LCSC Part #=C2859666, MANUFACTURER_NAME="Texas Instruments", Mouser Part Number=595-TMP236A2DBZR, Arrow Part Number=TMP236A2DBZR, Arrow Price/Stock=https://www.arrow.com/en/products/tmp236a2dbzr/texas-instruments?region=nac, Datasheet Link=http://www.ti.com/lit/gpn/tmp236, Height=1.12mm, MANUFACTURER_PART_NUMBER=TMP236A2DBZR, Mouser Price/Stock=https://www.mouser.co.uk/ProductDetail/Texas-Instruments/TMP236A2DBZR?qs=lc2O%252BfHJPVanftlPgPUvow%3D%3D
IC3: "Arm Cortex-M4 32-bit MCU+FPU, 170 MHz / 213 DMIPS, up to 128 KB Flash, 32 KB SRAM, rich analog, math accelerator", LCSC Part #=C529355, MANUFACTURER_NAME=STMicroelectronics, Mouser Part Number=511-STM32G431CBT6, Arrow Part Number=STM32G431CBT6, Arrow Price/Stock=https://www.arrow.com/en/products/stm32g431cbt6/stmicroelectronics?utm_currency=USD&region=nac, Datasheet Link=https://www.st.com/resource/en/datasheet/stm32g431cb.pdf, Height=1.6mm, MANUFACTURER_PART_NUMBER=STM32G431CBT6, Mouser Price/Stock=https://www.mouser.co.uk/ProductDetail/STMicroelectronics/STM32G431CBT6?qs=T3oQrply3y8OocyGDXq5wg%3D%3D
IC4: "500kHz 2A Buck Adjustable 596mV~28V 1 TSOT-23-6 Voltage Regulators - DC DC Switching Regulators RoHS", LCSC Part #=C527684, MANUFACTURER_NAME="Texas Instruments", Mouser Part Number=595-TPS54202HDDCR, Arrow Part Number=TPS54202HDDCR, Arrow Price/Stock=https://www.arrow.com/en/products/tps54202hddcr/texas-instruments?utm_currency=USD&region=europe, Datasheet Link=http://www.ti.com/lit/gpn/tps54202h, Height=1.1mm, Manu Part #=TPS54202HDDCR, MANUFACTURER_PART_NUMBER=TPS54202HDDCR, Mouser Price/Stock=https://www.mouser.co.uk/ProductDetail/Texas-Instruments/TPS54202HDDCR?qs=uP22XH7NdCtzy%252BOdxI8qhQ%3D%3D
J1: "SSL Connector 10 Position Adapter, Bridge Board to Board - Card Edge 0.079\" (2.00mm)"
J2: "3P 1x3P PH Tin -25℃~+85℃ White 2mm 100V 3 2A 1 Right Angle Through Hole,Right Angle,P=2mm Headers, Male Pins RoHS", LCSC Part #=C157929, Manu Part #=S3B-PH-K-S-(LF)(SN)
J3: "USB 2.0 3A 1 Surface Mount, Right Angle 16P Female -40℃~+85℃ Type-C SMD USB Connectors ROHS", LCSC Part #=C2988369, Manu Part #=GT-USB-7010ASV
L1: library part FTC303020D100MBCA, "2.5A 10uH ±20% 3.8A 135mΩ SMD,3x3mm Fixed Inductors RoHS", LCSC Part #=C7423323, Manu Part #=FTC303020D100MBCA
LED1: library part LTST-C150KGKT, "20mA 44.5mcd Water Clear -55℃~+85℃ 571nm Yellow Green 130° 75mW 2V 1206 LED Indication - Discrete ROHS", LCSC Part #=C125085, MANUFACTURER_NAME=Lite-On, Mouser Part Number=859-LTST-C150KGKT, Arrow Part Number=LTST-C150KGKT, Arrow Price/Stock=https://www.arrow.com/en/products/ltst-c150kgkt/lite-on-technology?utm_currency=USD&region=nac, Datasheet Link=http://optoelectronics.liteon.com/upload/download/ds22-2000-072/ltst-c150kgkt.pdf, Height=1.2mm, Manu Part #=LTST-C150KGKT, MANUFACTURER_PART_NUMBER=LTST-C150KGKT, Mouser Price/Stock=https://www.mouser.co.uk/ProductDetail/Lite-On/LTST-C150KGKT?qs=G7lFeYdtIHB%2FzaFKBwEyXw%3D%3D
Q1 Q2 Q3 Q4 Q5 Q6: "60V 117A 2.8mΩ@10V,15A 2V 1 N-Channel PowerPAKSO-8 MOSFETs ROHS", LCSC Part #=C467943
R1 R2 R3 R10 R11 R12: library part RC0402FR-0710RL, "10 Ohms ±1% 0.063W, 1/16W Chip Resistor 0402 (1005 Metric) Moisture Resistant Thick Film", Arrow Part Number=RC0402FR-0710KL, LCSC Part #=C138066, MANUFACTURER_NAME=YAGEO, Mouser Part Number=603-RC0402FR-0710KL, Arrow Price/Stock=https://www.arrow.com/en/products/rc0402fr-0710kl/yageo?region=europe, Datasheet Link=https://componentsearchengine.com/Datasheets/2/RC0402FR-0710KL.pdf, Height=0.4mm, Manu Part #=RC0402FR-0710RL, MANUFACTURER_PART_NUMBER=RC0402FR-0710KL, Mouser Price/Stock=https://www.mouser.co.uk/ProductDetail/YAGEO/RC0402FR-0710KL?qs=I1mnnYJTTsxUoNwrUsQExA%3D%3D
R4 R5 R6: library part RC0402FR-074K7L, "4.7 kOhms ±1% 0.063W, 1/16W Chip Resistor 0402 (1005 Metric) Moisture Resistant Thick Film", Arrow Part Number=RC0402FR-0710KL, LCSC Part #=C105871, MANUFACTURER_NAME=YAGEO, Mouser Part Number=603-RC0402FR-0710KL, Arrow Price/Stock=https://www.arrow.com/en/products/rc0402fr-0710kl/yageo?region=europe, Datasheet Link=https://componentsearchengine.com/Datasheets/2/RC0402FR-0710KL.pdf, Height=0.4mm, Manu Part #=RC0402FR-074K7L, MANUFACTURER_PART_NUMBER=RC0402FR-0710KL, Mouser Price/Stock=https://www.mouser.co.uk/ProductDetail/YAGEO/RC0402FR-0710KL?qs=I1mnnYJTTsxUoNwrUsQExA%3D%3D
R7 R8 R9 R17 R20 R23 R25 R29 R31: library part RC0402FR-071KL, "1 kOhms ±1% 0.063W, 1/16W Chip Resistor 0402 (1005 Metric) Moisture Resistant Thick Film", Arrow Part Number=RC0402FR-0710KL, LCSC Part #=C106235, MANUFACTURER_NAME=YAGEO, Mouser Part Number=603-RC0402FR-0710KL, Arrow Price/Stock=https://www.arrow.com/en/products/rc0402fr-0710kl/yageo?region=europe, Datasheet Link=https://componentsearchengine.com/Datasheets/2/RC0402FR-0710KL.pdf, Height=0.4mm, Manu Part #=RC0402FR-071KL, MANUFACTURER_PART_NUMBER=RC0402FR-0710KL, Mouser Price/Stock=https://www.mouser.co.uk/ProductDetail/YAGEO/RC0402FR-0710KL?qs=I1mnnYJTTsxUoNwrUsQExA%3D%3D
R13 R14 R15: library part PMR25HZPFV1L00, "1W 1mΩ Current Sense Resistor ±100ppm/℃ ±1% 1210 Current Sense Resistors / Shunt Resistors ROHS", LCSC Part #=C509735
R16 R21 R22 R26 R27 R32 R37: library part RC0402FR-07100KL, "100 kOhms ±1% 0.063W, 1/16W Chip Resistor 0402 (1005 Metric) Moisture Resistant Thick Film", Arrow Part Number=RC0402FR-0710KL, LCSC Part #=C60491, MANUFACTURER_NAME=YAGEO, Mouser Part Number=603-RC0402FR-0710KL, Arrow Price/Stock=https://www.arrow.com/en/products/rc0402fr-0710kl/yageo?region=europe, Datasheet Link=https://componentsearchengine.com/Datasheets/2/RC0402FR-0710KL.pdf, Height=0.4mm, Manu Part #=RC0402FR-07100KL, MANUFACTURER_PART_NUMBER=RC0402FR-0710KL, Mouser Price/Stock=https://www.mouser.co.uk/ProductDetail/YAGEO/RC0402FR-0710KL?qs=I1mnnYJTTsxUoNwrUsQExA%3D%3D
R18 R19 R24 R30: library part RC0402FR-070RL, "0 Ohms Jumper Chip Resistor 0402 (1005 Metric) Moisture Resistant Thick Film", Arrow Part Number=RC0402FR-0710KL, LCSC Part #=C106231, MANUFACTURER_NAME=YAGEO, Mouser Part Number=603-RC0402FR-0710KL, Arrow Price/Stock=https://www.arrow.com/en/products/rc0402fr-0710kl/yageo?region=europe, Datasheet Link=https://componentsearchengine.com/Datasheets/2/RC0402FR-0710KL.pdf, Height=0.4mm, Manu Part #=RC0402FR-070RL, MANUFACTURER_PART_NUMBER=RC0402FR-0710KL, Mouser Price/Stock=https://www.mouser.co.uk/ProductDetail/YAGEO/RC0402FR-0710KL?qs=I1mnnYJTTsxUoNwrUsQExA%3D%3D
R28: library part RC0402FR-07330RL, "330 Ohms ±1% 0.063W, 1/16W Chip Resistor 0402 (1005 Metric) Moisture Resistant Thick Film", Arrow Part Number=RC0402FR-0710KL, LCSC Part #=C105875, MANUFACTURER_NAME=YAGEO, Mouser Part Number=603-RC0402FR-0710KL, Arrow Price/Stock=https://www.arrow.com/en/products/rc0402fr-0710kl/yageo?region=europe, Datasheet Link=https://componentsearchengine.com/Datasheets/2/RC0402FR-0710KL.pdf, Height=0.4mm, Manu Part #=RC0402FR-07330RL, MANUFACTURER_PART_NUMBER=RC0402FR-0710KL, Mouser Price/Stock=https://www.mouser.co.uk/ProductDetail/YAGEO/RC0402FR-0710KL?qs=I1mnnYJTTsxUoNwrUsQExA%3D%3D
R33: library part RC0402FR-0710KL, "10 kOhms ±1% 0.063W, 1/16W Chip Resistor 0402 (1005 Metric) Moisture Resistant Thick Film", MANUFACTURER_NAME=YAGEO, Mouser Part Number=603-RC0402FR-0710KL, Arrow Part Number=RC0402FR-0710KL, Arrow Price/Stock=https://www.arrow.com/en/products/rc0402fr-0710kl/yageo?region=europe, Datasheet Link=https://componentsearchengine.com/Datasheets/2/RC0402FR-0710KL.pdf, Height=0.4mm, MANUFACTURER_PART_NUMBER=RC0402FR-0710KL, Mouser Price/Stock=https://www.mouser.co.uk/ProductDetail/YAGEO/RC0402FR-0710KL?qs=I1mnnYJTTsxUoNwrUsQExA%3D%3D
R34 R35: library part RC0402FR-075K1L, "5.1 kOhms ±1% 0.063W, 1/16W Chip Resistor 0402 (1005 Metric) Moisture Resistant Thick Film", Arrow Part Number=RC0402FR-0710KL, LCSC Part #=C105872, MANUFACTURER_NAME=YAGEO, Mouser Part Number=603-RC0402FR-0710KL, Arrow Price/Stock=https://www.arrow.com/en/products/rc0402fr-0710kl/yageo?region=europe, Datasheet Link=https://componentsearchengine.com/Datasheets/2/RC0402FR-0710KL.pdf, Height=0.4mm, Manu Part #=RC0402FR-075K1L, MANUFACTURER_PART_NUMBER=RC0402FR-0710KL, Mouser Price/Stock=https://www.mouser.co.uk/ProductDetail/YAGEO/RC0402FR-0710KL?qs=I1mnnYJTTsxUoNwrUsQExA%3D%3D
R36: library part RC0402FR-07510KL, "510 kOhms ±1% 0.063W, 1/16W Chip Resistor 0402 (1005 Metric) Moisture Resistant Thick Film", Arrow Part Number=RC0402FR-0710KL, LCSC Part #=C137961, MANUFACTURER_NAME=YAGEO, Mouser Part Number=603-RC0402FR-0710KL, Arrow Price/Stock=https://www.arrow.com/en/products/rc0402fr-0710kl/yageo?region=europe, Datasheet Link=https://componentsearchengine.com/Datasheets/2/RC0402FR-0710KL.pdf, Height=0.4mm, Manu Part #=RC0402FR-07510KL, MANUFACTURER_PART_NUMBER=RC0402FR-0710KL, Mouser Price/Stock=https://www.mouser.co.uk/ProductDetail/YAGEO/RC0402FR-0710KL?qs=I1mnnYJTTsxUoNwrUsQExA%3D%3D
R38: library part RC1206FR-070RL, "0Ω 250mW 200V Thick Film Resistor ±1% 1206 Chip Resistor - Surface Mount RoHS", LCSC Part #=C137394, MANUFACTURER_NAME=YAGEO, Mouser Part Number=603-RC1206FR-070RL, Arrow Part Number=RC1206FR-070RL, Arrow Price/Stock=https://www.arrow.com/en/products/rc1206fr-070rl/yageo?region=nac, Datasheet Link=https://www.yageogroup.com/content/datasheet/asset/file/PYU-RC_GROUP_51_ROHS_L, Height=0.65mm, Manu Part #=RC1206FR-070RL, MANUFACTURER_PART_NUMBER=RC1206FR-070RL, Mouser Price/Stock=https://www.mouser.co.uk/ProductDetail/YAGEO/RC1206FR-070RL?qs=%2FbpERZPLKKvgeF8VBtNQLg%3D%3D
R39: library part RC0402FR-0722K1L, "22.1 kOhms ±1% 0.063W, 1/16W Chip Resistor 0402 (1005 Metric) Moisture Resistant Thick Film", Arrow Part Number=RC0402FR-0710KL, LCSC Part #=C163478, MANUFACTURER_NAME=YAGEO, Mouser Part Number=603-RC0402FR-0710KL, Arrow Price/Stock=https://www.arrow.com/en/products/rc0402fr-0710kl/yageo?region=europe, Datasheet Link=https://componentsearchengine.com/Datasheets/2/RC0402FR-0710KL.pdf, Height=0.4mm, Manu Part #=RC0402FR-0722K1L, MANUFACTURER_PART_NUMBER=RC0402FR-0710KL, Mouser Price/Stock=https://www.mouser.co.uk/ProductDetail/YAGEO/RC0402FR-0710KL?qs=I1mnnYJTTsxUoNwrUsQExA%3D%3D
S1: "Without Bracket 50mA 4mm 100,000 Cycles 12V 1.6N 3mm 2mm Round Button Surface Mount,Vertical SPST SMD Tactile Switches ROHS", LCSC Part #=C720477, Manu Part #=TS-1088-AR02016

## Free pads (board coordinates)
  rect 4x4 hole 2.7: 1(29,33.5) 2(29,28)
  rect 2.8x2.8 hole 1.8: 1(50.3,5.5) 1(50.3,18) 1(50.3,30.5)
  round 1.6 hole 1: 27(11.6,20.6) 27(12.3,6.8) 27(12.6,16.3) 27(12.6,18.5) 27(16.9,1.1) 27(17,20.1) 27(17,22.3) 27(19.7,22.3) 27(23.5,6.8) 27(23.9,1.8) 27(26.2,6.7) 27(28.2,8.2) 27(50.3,11.5) 27(50.3,24) 27(50.3,36)

## Via types
v1: diameter 0.45, hole 0.3, Top Layer (SIG) to Bottom Layer (SIG), tented both sides, 567 vias

## Nets (pads, with @x,y where several pads share a name; then routed paths per layer and width w, separated by ;. In a path a pad name is that pad's centre, name@x,y a point inside that pad or via, vN(x,y) a via of type N, cw(c..) or ccw(c..) an arc to the next point about the centre after c; other vN are vias at no path point)
+3V3: C13.2 C16.2 C17.2 C18.2 C19.2 C20.2 C30.2 C31.2 C32.2 C33.2 D4.1 D5.1 D6.1 D10.5 D11.5 FB1.2 IC2.1 IC3.1 IC3.24 IC3.36 IC3.48 J1.5 L1.2 R37.2 | length 45.2
  Top Layer (SIG) w0.15: J1.5@2.5,10.3 3.975,10.3 4.4,10.725 v1(4.4,11.4) ; D10.5@8.434,5.9 v1(9.1,5.9) ; v1(11.44,8.74) C17.2@12.1,8.74 12.51,9.15 IC3.48@13.462,9.15 ; v1(14.4,18.3) 14.4,17.64 14.95,17.09 IC3.36@14.95,16.138 ; v1(14.6,3.5) C16.2@14.6,4.7 ; C20.2@14.9,6.2 14.95,6.25 IC3.1@14.95,7.662 ; v1(16.2,3.2) D4.1@16.2,4 ; v1(18.45,19.9) D6.1@19.05,19.9 ; IC3.24@21.938,14.65 22.93,14.65 C19.2@23.4,15.12 ; v1(22.92,15.6) C19.2@23.4,15.12 ; FB1.2@25.9,15 23.52,15 C19.2@23.4,15.12
  Top Layer (SIG) w0.3: C16.2@14.6,4.7 14.9,5 C20.2@14.9,6.2
  Bottom Layer (SIG) w0.15: D11.5@8.434,11.3 v1(9.1,11.3) ; D5.1@26,9.7 26.15,9.7 26.493,9.357 26.743,9.357 v1(26.8,9.3) ; v1(34.3,0.95) 34.35,0.9 40.318,0.9 42.525,3.107 42.525,3.525 42.75,3.75 IC2.1@43.075,3.75 ; IC2.1@43.06,3.765 C13.2@43.06,4.84
  Bottom Layer (SIG) w0.3: C30.2@12.6,30.9 14.5,30.9 16.2,32.6 23,32.6 23.88,31.72 R37.2@23.88,30.4
  other v1: 10.6,27.1 11.6,27.1 12.6,27.1 10.6,28.1 11.6,28.1 12.6,28.1 10.6,29.1 11.6,29.1 12.6,29.1 10.6,30.1 11.6,30.1 12.6,30.1 10.6,31.1 11.6,31.1 12.6,31.1
+3V3A: C15.2 C21.2 FB1.1 IC3.20 IC3.21 | length 4.8
  Top Layer (SIG) w0.2: IC3.20@21.938,12.65 IC3.21@21.938,13.15 23.07,13.15 C15.2@23.2,13.02 C21.2@24.2,13.02 24.755,13.575 25.875,13.575 FB1.1@25.9,13.6
ADC1_IN1: IC3.8 R18.2 | length 1.6
  Top Layer (SIG) w0.15: R18.2@18,6.22 18.45,6.67 IC3.8@18.45,7.662
ADC1_IN10: C11.2 D4.2 IC3.5 pad.27@16.9,1.1 R5.1 R8.2 | length 6.7
  Top Layer (SIG) w0.2: pad.27@16.9,1.1 16.9,2.5 R5.1@17,2.6 16.9,2.7 C11.2@16.9,6.3 16.95,6.35 IC3.5@16.95,7.662
ADC1_IN14: C10.2 D6.2 IC3.25 pad.27@19.7,22.3 R4.1 R7.2 | length 7.3
  Top Layer (SIG) w0.2: pad.27@19.7,22.3 19.75,22.25 D6.2@19.75,19.9 20.4,19.9 R4.1@20.56,19.74 ; IC3.25@20.45,16.138 20.45,16.95 20.56,17.06 C10.2@20.56,17.6 ; C10.2@20.45,17.55 20.4,17.6 20.56,17.76 R7.2@20.56,18.7 20.6,18.74 R4.1@20.6,19.94
ADC2_IN4: IC3.15 R24.2 | length 1.9
  Top Layer (SIG) w0.15: IC3.15@21.938,10.15 23.33,10.15 R24.2@23.68,10.5
ADC2_IN12: C12.2 D5.2 IC3.18 pad.27@28.2,8.2 R6.1 R9.2 | length 8
  Top Layer (SIG) w0.15: IC3.18@22.394,11.644 22.737,11.644 22.957,11.425 v1(22.999,11.425)
  Bottom Layer (SIG) w0.15: v1(22.999,11.425) 23.835,11.425 C12.2@23.9,11.36 R9.2@25,11.36 25.96,11.36 R6.1@26,11.4 D5.2@26,10.4 26.125,10.275 26.461,10.275 28.2,8.536 pad.27@28.2,8.2
ADC2_IN17: IC2.2 IC3.12 | length 26.4
  Top Layer (SIG) w0.15: IC3.12@20.45,7.662 20.45,7.212 20.525,7.137 20.982,7.137 21.219,6.9 v1(21.3,6.9)
  Bottom Layer (SIG) w0.15: v1(21.3,6.9) 27.7,0.5 41.475,0.5 42.825,1.85 IC2.2@43.075,1.85
AGND: C15.1 C21.1 IC3.19 R19.1 | length 3.3
  Top Layer (SIG) w0.2: IC3.19@21.938,12.15 23.15,12.15 C15.1@23.2,12.1 C21.1@24.2,12.1 24.5,12.4 R19.1@25.14,12.4
BSTA: C5.2 IC1.20 | length 1.9
  Bottom Layer (SIG) w0.2: IC1.20@32.2,12.575 32.25,12.525 33.785,12.525 C5.2@34,12.74
BSTB: C6.2 IC1.17 | length 1.9
  Bottom Layer (SIG) w0.2: IC1.17@32.2,14.525 32.221,14.546 33.806,14.546 C6.2@34,14.74
BSTC: C7.2 IC1.14 | length 1.9
  Bottom Layer (SIG) w0.2: IC1.14@32.2,16.475 32.27,16.545 33.905,16.545 C7.2@34,16.64
DGND: C10.1 C11.1 C12.1 C13.1 C16.1 C17.1 C18.1 C19.1 C20.1 C24.1 D10.2 D11.2 IC2.3 IC3.23 IC3.35 IC3.47 J1.1 J2.1 LED1.1 R7.1 R8.1 R9.1 R19.2 R21.1 R26.1 R32.1 R33.1 R38.2 S1.1 | length 17.1
  Top Layer (SIG) w0.15: v1(5.9,5.7) 5.981,5.7 6.181,5.9 D10.2@6.766,5.9 ; C17.1@12.1,9.66 12.11,9.65 IC3.47@13.462,9.65 ; C18.1@15.36,17.6 15.45,17.51 IC3.35@15.45,16.138 ; v1(17.8,4.4) 17.815,4.385 17.815,4.025 R21.1@18.04,3.8 ; C10.1@19.64,17.6 R7.1@19.64,18.7 ; IC3.23@21.938,14.15 23.35,14.15 C19.1@23.4,14.2
  Bottom Layer (SIG) w0.15: v1(34.505,1.514) 34.523,1.514 34.836,1.2 39.05,1.2 40.65,2.8 IC2.3@40.975,2.8 41.2,3.025 41.6,3.025 42.14,3.565 C13.1@42.14,4.84
  other v1: 9.1,1.6 12.1,1.6 13.6,1.6 15.1,1.6 18.1,1.6 21.1,1.6 22.6,1.6 25.6,1.6 28.6,1.6 30.1,1.6 31.6,1.6 33.1,1.6 9.1,3.1 12.1,3.1 13.6,3.1 15.1,3.1 7.6,4.6 9.1,4.6 10.6,4.6 12.1,4.6 22.6,4.6 25.6,4.6 27.1,4.6 28.6,4.6 30.1,4.6 33.1,4.6 34.6,4.6 10.6,6.1 28.6,6.1 31.6,6.1 33.1,6.1 34.6,6.1 9.1,7.6 13.6,7.6 21.1,7.6 27.1,7.6 31.6,7.6 33.1,7.6 34.6,7.6 7.6,9.1 10.6,9.1 15.1,9.1 16.6,9.1 19.6,9.1 31.6,9.1 33.1,9.1 34.6,9.1 15.1,10.6 16.6,10.6 18.1,10.6 19.6,10.6 31.6,10.6 33.1,10.6 34.6,10.6 3.1,12.1 15.1,12.1 16.6,12.1 18.1,12.1 28.6,12.1 3.1,13.6 6.1,13.6 7.6,13.6 15.1,13.6 16.6,13.6 28.6,13.6 1.6,15.1 3.1,15.1 4.6,15.1 6.1,15.1 9.1,15.1 10.6,15.1 28.6,15.1 1.6,16.6 3.1,16.6 4.6,16.6 10.6,16.6 1.6,18.1 3.1,18.1 4.6,18.1 9.1,18.1 10.6,18.1 1.6,19.6 3.1,19.6 4.6,19.6 9.1,19.6 10.6,19.6 25.6,19.6 27.1,19.6 28.6,19.6 30.1,19.6 31.6,19.6 33.1,19.6 1.6,21.1 3.1,21.1 4.6,21.1 9.1,21.1 15.1,21.1 24.1,21.1 27.1,21.1 28.6,21.1 30.1,21.1 31.6,21.1 33.1,21.1 34.6,21.1 1.6,22.6 3.1,22.6 4.6,22.6 6.1,22.6 7.6,22.6 9.1,22.6 10.6,22.6 13.6,22.6 15.1,22.6 21.1,22.6 25.6,22.6
GHA: D1.1 IC1.19 R1.1 | length 15.2
  Top Layer (SIG) w0.2: v1(44.2,11.5) 44.25,11.55 D1.1@45.21,11.55 46.49,11.55 R1.1@46.64,11.7
  Int3 (SIG) w0.2: v1(33.3,13) 33.9,12.4 39.6,12.4 40.5,11.5 v1(44.2,11.5)
  Bottom Layer (SIG) w0.2: IC1.19@32.2,13.225 32.325,13.1 33.132,13.1 33.232,13 v1(33.3,13)
GHB: D2.1 IC1.16 R2.1 | length 18.4
  Top Layer (SIG) w0.2: v1(44.046,23.975) 44.059,23.962 45.088,23.962 D2.1@45.1,23.95 46.49,23.95 R2.1@46.54,23.9
  Int3 (SIG) w0.2: v1(33.338,15.138) 33.338,15.738 41.175,23.575 41.747,23.575 42.147,23.975 v1(44.046,23.975)
  Bottom Layer (SIG) w0.2: IC1.16@32.2,15.175 32.219,15.156 33.319,15.156 v1(33.338,15.138)